# EAGLE board OOBD - BTM182-BTM222 - V5 - EuroPCB (EAGLE 5.11), part 1 of 3
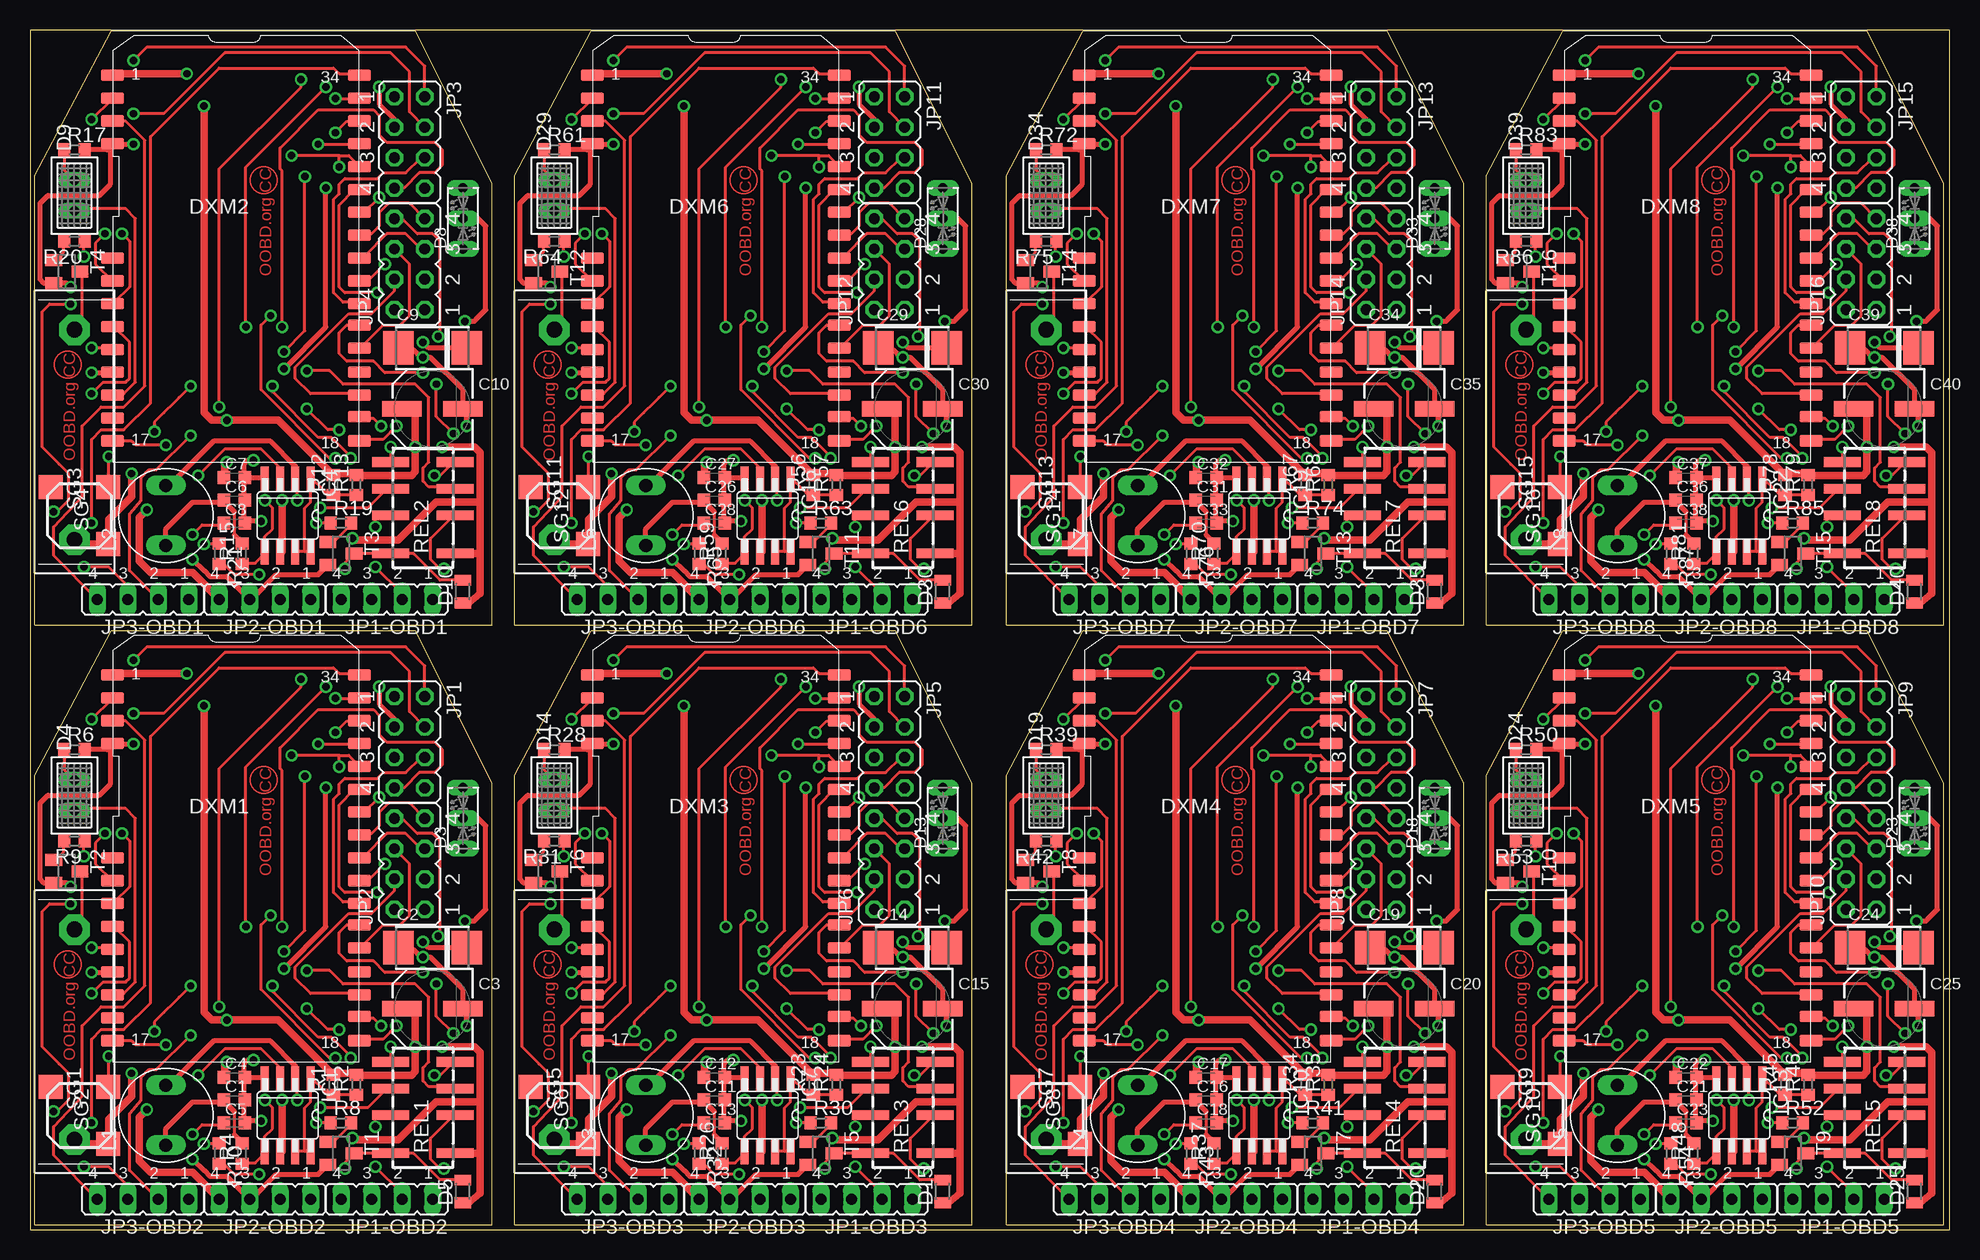
[diagram p0: board, top side]
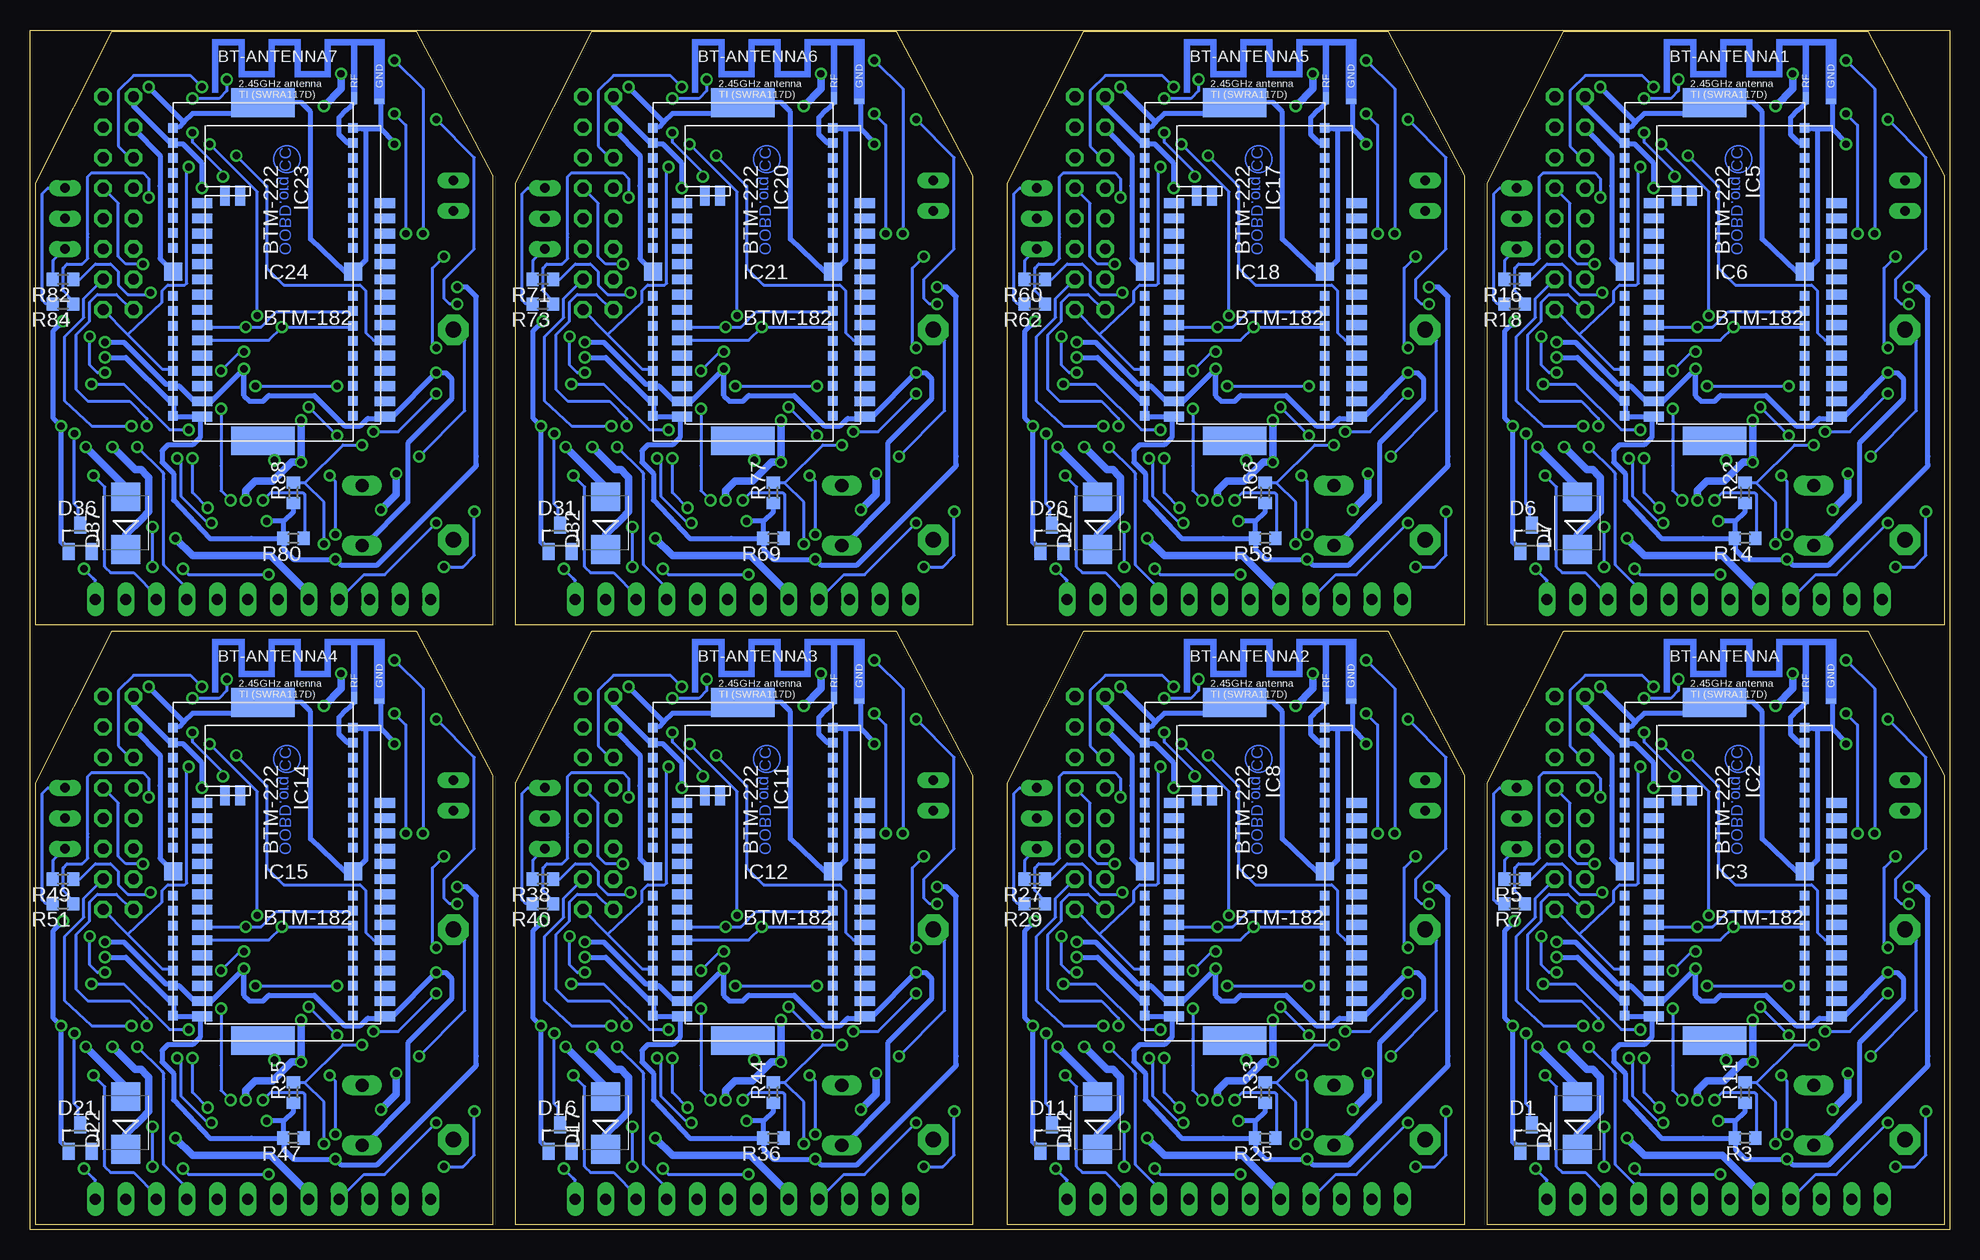
[diagram p1: board, bottom side, seen from below]

Size 160 x 100 mm. Coordinates in mm from the lower left corner, seen from the top.
Outline: 0.41,0.38 38.5,0.38 38.5,37.22 32.15,49.91
Outline: 0.4,0.39 0.4,37.85
Outline: 0.41,37.85 6.75,49.91 32.14,49.91
Outline: 0.41,50.38 38.5,50.38 38.5,87.22 32.15,99.91
Outline: 0.4,50.39 0.4,87.85
Outline: 0.41,87.85 6.75,99.91 32.14,99.91
Outline: 40.41,0.38 78.5,0.38 78.5,37.22 72.15,49.91
Outline: 40.4,0.39 40.4,37.85
Outline: 40.41,37.85 46.75,49.91 72.14,49.91
Outline: 81.41,0.38 119.5,0.38 119.5,37.22 113.15,49.91
Outline: 81.4,0.39 81.4,37.85
Outline: 81.41,37.85 87.75,49.91 113.14,49.91
Outline: 121.41,0.38 159.5,0.38 159.5,37.22 153.15,49.91
Outline: 121.4,0.39 121.4,37.85
Outline: 121.41,37.85 127.75,49.91 153.14,49.91
Outline: 40.41,50.38 78.5,50.38 78.5,87.22 72.15,99.91
Outline: 40.4,50.39 40.4,87.85
Outline: 40.41,87.85 46.75,99.91 72.14,99.91
Outline: 81.41,50.38 119.5,50.38 119.5,87.22 113.15,99.91
Outline: 81.4,50.39 81.4,87.85
Outline: 81.41,87.85 87.75,99.91 113.14,99.91
Outline: 121.41,50.38 159.5,50.38 159.5,87.22 153.15,99.91
Outline: 121.4,50.39 121.4,87.85
Outline: 121.41,87.85 127.75,99.91 153.14,99.91
Outline: 0,100 0,0 112,0 160,0 160,86 160,100 0,100
Copper layers (1*16): Top 0.035mm / dielectric 1.5mm / Bottom 0.035mm
Design rules "default *": minimum track width 10mil, minimum drill 24mil, track to track 8mil, track to pad 8mil, pad to pad 8mil, via to via 8mil, smd to smd 8mil, copper to edge 12mil, drill to drill 8mil, minimum pad ring 10mil, minimum via ring 8mil, stop-mask expansion 4mil, vias tented up to drill 0mil, thermal gap 10mil

## Footprints (pad centres in the part's own frame; a part is rotated, then mirrored left to right if it is on the bottom)
SWRA117D_RIGHT = smd 0.813 x 0.406: GND -0.45,0.25 | smd 0.508 x 1.016: RF -2.55,0.5
C0603K = smd 1.05 x 1.08: 1 -0.875,0; 2 0.875,0
C6032-TE-C = smd 2.54 x 2.794: + 2.857,0; - -2.857,0
SV-D = smd 3.302 x 1.27: + -2.54,0; - 2.54,0
SOT23 = smd 1 x 1.4: 1 -0.95,-1.1; 2 0.95,-1.1; 3 0,1.1
SMB = smd 2.4 x 2.4: A 2.2,0; C -2.2,0
DUOLED2X5 = drill 0.813 long: AG -2.54,0; AR 2.54,0; K 0,0
U57X32 = drill 0.813 long: A -1.27,0; K 1.27,0
MICROMELF-W = smd 0.9 x 1.4: A 0.95,0; C -0.95,0
DMX1-MINI = smd 1.93 x 0.965: 1 0,32.258; 2 0,30.353; 3 0,28.448; 4 0,26.543; 9 0,17.018; 10 0,15.113; 11 0,13.208; 12 0,11.303; 13 0,9.398; 14 0,7.493; 15 0,5.588; 16 0,3.683; 17 0,1.778; 18 20.574,1.778; 19 20.574,3.81; 20 20.574,5.588; 21 20.574,7.493; 22 20.574,9.525; 23 20.574,11.43; 24 20.574,13.208; 25 20.574,15.113; 26 20.574,17.018; 27 20.574,18.923; 28 20.574,20.828; 29 20.574,22.733; 30 20.574,24.638; 31 20.574,26.543; 32 20.574,28.448; 33 20.574,30.353; 34 20.574,32.258
SO8 = smd 0.66 x 2.032: 1 -1.905,-3.073; 2 -0.635,-3.073; 3 0.635,-3.073; 4 1.905,-3.073; 5 1.905,3.073; 6 0.635,3.073; 7 -0.635,3.073; 8 -1.905,3.073
BTM-222 = smd 0.8 x 0.8: P$1 -12.635,-7.5; P$2 -11.385,-7.5; P$3 -10.135,-7.5; P$4 -8.885,-7.5; P$5 -7.635,-7.5; P$6 -6.385,-7.5; P$7 -5.135,-7.5; P$8 -3.885,-7.5; P$9 -2.635,-7.5; P$11 1.365,-7.5; P$12 2.615,-7.5; P$13 3.865,-7.5; P$14 5.115,-7.5; P$15 6.365,-7.5; P$16 7.615,-7.5; P$17 8.865,-7.5; P$18 10.115,-7.5; P$19 11.365,-7.5; P$20 11.365,7.5; P$21 10.115,7.5; P$22 8.865,7.5; P$23 7.615,7.5; P$24 6.365,7.5; P$25 5.115,7.5; P$26 3.865,7.5; P$27 2.615,7.5; P$28 1.365,7.5; P$30 -2.635,7.5; P$31 -3.885,7.5; P$32 -5.135,7.5; P$33 -6.385,7.5; P$34 -7.635,7.5; P$35 -8.885,7.5; P$36 -10.135,7.5; P$37 -11.385,7.5; P$38 -12.635,7.5 | smd 1.5 x 1.5: P$10 -0.635,-7.5; P$29 -0.635,7.5 | smd 2.4 x 5.3: P$AGND -14.735,0; P$BGND 13.465,0
BTM-182 = smd 1.676 x 0.813: P$1 -7.62,7.62; P$2 -7.62,6.35; P$3 -7.62,5.08; P$4 -7.62,3.81; P$5 -7.62,2.54; P$6 -7.62,1.27; P$7 -7.62,0; P$8 -7.62,-1.27; P$9 -7.62,-2.54; P$10 -7.62,-3.81; P$11 -7.62,-5.08; P$12 -7.62,-6.35; P$13 -7.62,-7.62; P$14 -7.62,-8.89; P$15 -7.62,-10.16; P$16 7.62,-10.16; P$17 7.62,-8.89; P$18 7.62,-7.62; P$19 7.62,-6.35; P$20 7.62,-5.08; P$21 7.62,-3.81; P$22 7.62,-2.54; P$23 7.62,-1.27; P$24 7.62,0; P$25 7.62,1.27; P$26 7.62,2.54; P$27 7.62,3.81; P$28 7.62,5.08; P$29 7.62,6.35; P$30 7.62,7.62 | smd 0.813 x 1.676: P$31 -4.445,8.255; P$32 -5.715,8.255
JP4Q = drill 0.914 octagon: 1 -3.81,-1.27; 2 -3.81,1.27; 3 -1.27,-1.27; 4 -1.27,1.27; 5 1.27,-1.27; 6 1.27,1.27; 7 3.81,-1.27; 8 3.81,1.27
JP4 = drill 0.914 long: 1 -3.81,0; 2 -1.27,0; 3 1.27,0; 4 3.81,0
07HCP-XXXX-50 = drill 1.1 long: 1 -2.5,0; 2 2.5,0
R0603 = smd 1 x 1.1: 1 -0.85,0; 2 0.85,0
FTR-B4GA = smd 0.8 x 3.1: 1 -3.8,-3.167; 2 -0.625,-3.167; 3 1.597,-3.167; 4 3.82,-3.167; 5 3.82,2.23; 6 1.597,2.23; 7 -0.625,2.23; 8 -3.8,2.23
PMB24F/V = drill 1.321 pad 2.54 octagon: 1 -9.004,0; 2 8.504,0
BME0603SA = smd 2 x 2: (+)LEAD 4.295,0.425; (-)LEAD -0.475,0.425; NC -0.475,-4.345

## Placement (x,y rotation side)
BT-ANTENNA  [SWRA117D_RIGHT]  9.42,43.81 0 bottom
BT-ANTENNA1  [SWRA117D_RIGHT]  9.42,93.81 0 bottom
BT-ANTENNA2  [SWRA117D_RIGHT]  49.42,43.81 0 bottom
BT-ANTENNA3  [SWRA117D_RIGHT]  90.42,43.81 0 bottom
BT-ANTENNA4  [SWRA117D_RIGHT]  130.42,43.81 0 bottom
BT-ANTENNA5  [SWRA117D_RIGHT]  49.42,93.81 0 bottom
BT-ANTENNA6  [SWRA117D_RIGHT]  90.42,93.81 0 bottom
BT-ANTENNA7  [SWRA117D_RIGHT]  130.42,93.81 0 bottom
C1  1µF  [C0603K]  17.04,10.79 0 top
C2  220µF/6V  [C6032-TE-C]  33.55,23.5 0 top
C3  47µ/35V  [SV-D]  33.55,18.41 0 top
C4  100nF  [C0603K]  17.04,12.7 0 top
C5  470pF  [C0603K]  17.04,8.89 0 top
C6  1µF  [C0603K]  17.04,60.8 0 top
C7  100nF  [C0603K]  17.04,62.7 0 top
C8  470pF  [C0603K]  17.04,58.89 0 top
C9  220µF/6V  [C6032-TE-C]  33.55,73.5 0 top
C10  47µ/35V  [SV-D]  33.55,68.42 0 top
C11  1µF  [C0603K]  57.04,10.79 0 top
C12  100nF  [C0603K]  57.04,12.7 0 top
C13  470pF  [C0603K]  57.04,8.89 0 top
C14  220µF/6V  [C6032-TE-C]  73.55,23.5 0 top
C15  47µ/35V  [SV-D]  73.55,18.41 0 top
C16  1µF  [C0603K]  98.04,10.79 0 top
C17  100nF  [C0603K]  98.04,12.7 0 top
C18  470pF  [C0603K]  98.04,8.89 0 top
C19  220µF/6V  [C6032-TE-C]  114.55,23.5 0 top
C20  47µ/35V  [SV-D]  114.55,18.41 0 top
C21  1µF  [C0603K]  138.04,10.79 0 top
C22  100nF  [C0603K]  138.04,12.7 0 top
C23  470pF  [C0603K]  138.04,8.89 0 top
C24  220µF/6V  [C6032-TE-C]  154.55,23.5 0 top
C25  47µ/35V  [SV-D]  154.55,18.41 0 top
C26  1µF  [C0603K]  57.04,60.8 0 top
C27  100nF  [C0603K]  57.04,62.7 0 top
C28  470pF  [C0603K]  57.04,58.89 0 top
C29  220µF/6V  [C6032-TE-C]  73.55,73.5 0 top
C30  47µ/35V  [SV-D]  73.55,68.42 0 top
C31  1µF  [C0603K]  98.04,60.8 0 top
C32  100nF  [C0603K]  98.04,62.7 0 top
C33  470pF  [C0603K]  98.04,58.89 0 top
C34  220µF/6V  [C6032-TE-C]  114.55,73.5 0 top
C35  47µ/35V  [SV-D]  114.55,68.42 0 top
C36  1µF  [C0603K]  138.04,60.8 0 top
C37  100nF  [C0603K]  138.04,62.7 0 top
C38  470pF  [C0603K]  138.04,58.89 0 top
C39  220µF/6V  [C6032-TE-C]  154.55,73.5 0 top
C40  47µ/35V  [SV-D]  154.55,68.42 0 top
D1  BAS40  [SOT23]  34.82,7.62 0 bottom
D2  B140  [SMB]  31.01,8.89 90 bottom
D3  [DUOLED2X5]  36.09,34.29 90 top
D4  U57X32  [U57X32]  3.71,36.2 90 top
D5  1N4148DO35-7  [MICROMELF-W]  36.09,3.17 90 top
D6  BAS40  [SOT23]  34.82,57.62 0 bottom
D7  B140  [SMB]  31.01,58.89 90 bottom
D8  [DUOLED2X5]  36.09,84.29 90 top
D9  U57X32  [U57X32]  3.71,86.19 90 top
D10  1N4148DO35-7  [MICROMELF-W]  36.09,53.17 90 top
D11  BAS40  [SOT23]  74.82,7.62 0 bottom
D12  B140  [SMB]  71.01,8.89 90 bottom
D13  [DUOLED2X5]  76.09,34.29 90 top
D14  U57X32  [U57X32]  43.7,36.2 90 top
D15  1N4148DO35-7  [MICROMELF-W]  76.09,3.17 90 top
D16  BAS40  [SOT23]  115.82,7.62 0 bottom
D17  B140  [SMB]  112.01,8.89 90 bottom
D18  [DUOLED2X5]  117.09,34.29 90 top
D19  U57X32  [U57X32]  84.7,36.2 90 top
D20  1N4148DO35-7  [MICROMELF-W]  117.09,3.17 90 top
D21  BAS40  [SOT23]  155.82,7.62 0 bottom
D22  B140  [SMB]  152.01,8.89 90 bottom
D23  [DUOLED2X5]  157.09,34.29 90 top
D24  U57X32  [U57X32]  124.7,36.2 90 top
D25  1N4148DO35-7  [MICROMELF-W]  157.09,3.17 90 top
D26  BAS40  [SOT23]  74.82,57.62 0 bottom
D27  B140  [SMB]  71.01,58.89 90 bottom
D28  [DUOLED2X5]  76.09,84.29 90 top
D29  U57X32  [U57X32]  43.7,86.19 90 top
D30  1N4148DO35-7  [MICROMELF-W]  76.09,53.17 90 top
D31  BAS40  [SOT23]  115.82,57.62 0 bottom
D32  B140  [SMB]  112.01,58.89 90 bottom
D33  [DUOLED2X5]  117.09,84.29 90 top
D34  U57X32  [U57X32]  84.7,86.19 90 top
D35  1N4148DO35-7  [MICROMELF-W]  117.09,53.17 90 top
D36  BAS40  [SOT23]  155.82,57.62 0 bottom
D37  B140  [SMB]  152.01,58.89 90 bottom
D38  [DUOLED2X5]  157.09,84.29 90 top
D39  U57X32  [U57X32]  124.7,86.19 90 top
D40  1N4148DO35-7  [MICROMELF-W]  157.09,53.17 90 top
DXM1  [DMX1-MINI]  6.88,13.97 0 top
DXM2  [DMX1-MINI]  6.88,63.97 0 top
DXM3  [DMX1-MINI]  46.88,13.97 0 top
DXM4  [DMX1-MINI]  87.88,13.97 0 top
DXM5  [DMX1-MINI]  127.88,13.97 0 top
DXM6  [DMX1-MINI]  46.88,63.97 0 top
DXM7  [DMX1-MINI]  87.88,63.97 0 top
DXM8  [DMX1-MINI]  127.88,63.97 0 top
IC1  MC34063-SO  [SO8]  21.48,9.53 180 top
IC2  BTM-222  [BTM-222]  19.58,29.21 270 bottom
IC3  BTM-182  [BTM-182]  17.04,27.94 0 bottom
IC4  MC34063-SO  [SO8]  21.48,59.52 180 top
IC5  BTM-222  [BTM-222]  19.58,79.21 270 bottom
IC6  BTM-182  [BTM-182]  17.04,77.94 0 bottom
IC7  MC34063-SO  [SO8]  61.48,9.53 180 top
IC8  BTM-222  [BTM-222]  59.58,29.21 270 bottom
IC9  BTM-182  [BTM-182]  57.04,27.94 0 bottom
IC10  MC34063-SO  [SO8]  102.48,9.53 180 top
IC11  BTM-222  [BTM-222]  100.58,29.21 270 bottom
IC12  BTM-182  [BTM-182]  98.04,27.94 0 bottom
IC13  MC34063-SO  [SO8]  142.49,9.53 180 top
IC14  BTM-222  [BTM-222]  140.58,29.21 270 bottom
IC15  BTM-182  [BTM-182]  138.04,27.94 0 bottom
IC16  MC34063-SO  [SO8]  61.48,59.52 180 top
IC17  BTM-222  [BTM-222]  59.58,79.21 270 bottom
IC18  BTM-182  [BTM-182]  57.04,77.94 0 bottom
IC19  MC34063-SO  [SO8]  102.48,59.52 180 top
IC20  BTM-222  [BTM-222]  100.58,79.21 270 bottom
IC21  BTM-182  [BTM-182]  98.04,77.94 0 bottom
IC22  MC34063-SO  [SO8]  142.49,59.52 180 top
IC23  BTM-222  [BTM-222]  140.58,79.21 270 bottom
IC24  BTM-182  [BTM-182]  138.04,77.94 0 bottom
JP1  Program  [JP4Q]  31.64,40.64 270 top
JP1-OBD1  [JP4]  29.74,52.54 180 top
JP1-OBD2  [JP4]  29.74,2.54 180 top
JP1-OBD3  [JP4]  69.74,2.54 180 top
JP1-OBD4  [JP4]  110.74,2.54 180 top
JP1-OBD5  [JP4]  150.74,2.54 180 top
JP1-OBD6  [JP4]  69.74,52.54 180 top
JP1-OBD7  [JP4]  110.74,52.54 180 top
JP1-OBD8  [JP4]  150.74,52.54 180 top
JP2  SPI / SD-Card  [JP4Q]  31.64,30.48 90 top
JP2-OBD1  [JP4]  19.58,52.54 180 top
JP2-OBD2  [JP4]  19.58,2.54 180 top
JP2-OBD3  [JP4]  59.58,2.54 180 top
JP2-OBD4  [JP4]  100.58,2.54 180 top
JP2-OBD5  [JP4]  140.58,2.54 180 top
JP2-OBD6  [JP4]  59.58,52.54 180 top
JP2-OBD7  [JP4]  100.58,52.54 180 top
JP2-OBD8  [JP4]  140.58,52.54 180 top
JP3  Program  [JP4Q]  31.64,90.64 270 top
JP3-OBD1  [JP4]  9.42,52.54 180 top
JP3-OBD2  [JP4]  9.42,2.54 180 top
JP3-OBD3  [JP4]  49.42,2.54 180 top
JP3-OBD4  [JP4]  90.42,2.54 180 top
JP3-OBD5  [JP4]  130.42,2.54 180 top
JP3-OBD6  [JP4]  49.42,52.54 180 top
JP3-OBD7  [JP4]  90.42,52.54 180 top
JP3-OBD8  [JP4]  130.42,52.54 180 top
JP4  SPI / SD-Card  [JP4Q]  31.64,80.48 90 top
JP5  Program  [JP4Q]  71.64,40.64 270 top
JP6  SPI / SD-Card  [JP4Q]  71.64,30.48 90 top
JP7  Program  [JP4Q]  112.64,40.64 270 top
JP8  SPI / SD-Card  [JP4Q]  112.64,30.48 90 top
JP9  Program  [JP4Q]  152.65,40.64 270 top
JP10  SPI / SD-Card  [JP4Q]  152.65,30.48 90 top
JP11  Program  [JP4Q]  71.64,90.64 270 top
JP12  SPI / SD-Card  [JP4Q]  71.64,80.48 90 top
JP13  Program  [JP4Q]  112.64,90.64 270 top
JP14  SPI / SD-Card  [JP4Q]  112.64,80.48 90 top
JP15  Program  [JP4Q]  152.65,90.64 270 top
JP16  SPI / SD-Card  [JP4Q]  152.65,80.48 90 top
L1  220µH  [07HCP-XXXX-50]  11.32,9.53 90 top
L2  220µH  [07HCP-XXXX-50]  11.32,59.52 90 top
L3  220µH  [07HCP-XXXX-50]  51.33,9.53 90 top
L4  220µH  [07HCP-XXXX-50]  92.33,9.53 90 top
L5  220µH  [07HCP-XXXX-50]  132.32,9.53 90 top
L6  220µH  [07HCP-XXXX-50]  51.33,59.52 90 top
L7  220µH  [07HCP-XXXX-50]  92.33,59.52 90 top
L8  220µH  [07HCP-XXXX-50]  132.32,59.52 90 top
R1  1R  [R0603]  25.3,12.06 90 top
R2  1R  [R0603]  27.2,12.06 90 top
R3  1K  [R0603]  17.04,7.62 180 bottom
R4  1K6  [R0603]  17.68,6.35 90 top
R5  100R  [R0603]  36.25,29.21 180 bottom
R6  120R  [R0603]  3.71,40.01 0 top
R7  100R  [R0603]  36.25,27.15 180 bottom
R8  4K7  [R0603]  25.93,8.89 0 top
R9  4K7  [R0603]  3.71,32.38 180 top
R10  180k  [R0603]  15.77,6.35 270 top
R11  47k  [R0603]  17.04,11.43 90 bottom
R12  1R  [R0603]  25.3,62.06 90 top
R13  1R  [R0603]  27.2,62.06 90 top
R14  1K  [R0603]  17.04,57.62 180 bottom
R15  1K6  [R0603]  17.68,56.35 90 top
R16  100R  [R0603]  36.25,79.21 180 bottom
R17  120R  [R0603]  3.71,90 0 top
R18  100R  [R0603]  36.25,77.15 180 bottom
R19  4K7  [R0603]  25.93,58.89 0 top
R20  4K7  [R0603]  3.71,82.39 180 top
R21  180k  [R0603]  15.77,56.35 270 top
R22  47k  [R0603]  17.04,61.43 90 bottom
R23  1R  [R0603]  65.3,12.06 90 top
R24  1R  [R0603]  67.2,12.06 90 top
R25  1K  [R0603]  57.04,7.62 180 bottom
R26  1K6  [R0603]  57.67,6.35 90 top
R27  100R  [R0603]  76.25,29.21 180 bottom
R28  120R  [R0603]  43.7,40.01 0 top
R29  100R  [R0603]  76.25,27.15 180 bottom
R30  4K7  [R0603]  65.93,8.89 0 top
R31  4K7  [R0603]  43.7,32.38 180 top
R32  180k  [R0603]  55.77,6.35 270 top
R33  47k  [R0603]  57.04,11.43 90 bottom
R34  1R  [R0603]  106.3,12.06 90 top
R35  1R  [R0603]  108.2,12.06 90 top
R36  1K  [R0603]  98.04,7.62 180 bottom
R37  1K6  [R0603]  98.67,6.35 90 top
R38  100R  [R0603]  117.25,29.21 180 bottom
R39  120R  [R0603]  84.7,40.01 0 top
R40  100R  [R0603]  117.25,27.15 180 bottom
R41  4K7  [R0603]  106.93,8.89 0 top
R42  4K7  [R0603]  84.7,32.38 180 top
R43  180k  [R0603]  96.77,6.35 270 top
R44  47k  [R0603]  98.04,11.43 90 bottom
R45  1R  [R0603]  146.29,12.06 90 top
R46  1R  [R0603]  148.2,12.06 90 top
R47  1K  [R0603]  138.04,7.62 180 bottom
R48  1K6  [R0603]  138.68,6.35 90 top
R49  100R  [R0603]  157.25,29.21 180 bottom
R50  120R  [R0603]  124.7,40.01 0 top
R51  100R  [R0603]  157.25,27.15 180 bottom
R52  4K7  [R0603]  146.93,8.89 0 top
R53  4K7  [R0603]  124.7,32.38 180 top
R54  180k  [R0603]  136.77,6.35 270 top
R55  47k  [R0603]  138.04,11.43 90 bottom
R56  1R  [R0603]  65.3,62.06 90 top
R57  1R  [R0603]  67.2,62.06 90 top
R58  1K  [R0603]  57.04,57.62 180 bottom
R59  1K6  [R0603]  57.67,56.35 90 top
R60  100R  [R0603]  76.25,79.21 180 bottom
R61  120R  [R0603]  43.7,90 0 top
R62  100R  [R0603]  76.25,77.15 180 bottom
R63  4K7  [R0603]  65.93,58.89 0 top
R64  4K7  [R0603]  43.7,82.39 180 top
R65  180k  [R0603]  55.77,56.35 270 top
R66  47k  [R0603]  57.04,61.43 90 bottom
R67  1R  [R0603]  106.3,62.06 90 top
R68  1R  [R0603]  108.2,62.06 90 top
R69  1K  [R0603]  98.04,57.62 180 bottom
R70  1K6  [R0603]  98.67,56.35 90 top
R71  100R  [R0603]  117.25,79.21 180 bottom
R72  120R  [R0603]  84.7,90 0 top
R73  100R  [R0603]  117.25,77.15 180 bottom
R74  4K7  [R0603]  106.93,58.89 0 top
R75  4K7  [R0603]  84.7,82.39 180 top
R76  180k  [R0603]  96.77,56.35 270 top
R77  47k  [R0603]  98.04,61.43 90 bottom
R78  1R  [R0603]  146.29,62.06 90 top
R79  1R  [R0603]  148.2,62.06 90 top
R80  1K  [R0603]  138.04,57.62 180 bottom
R81  1K6  [R0603]  138.68,56.35 90 top
R82  100R  [R0603]  157.25,79.21 180 bottom
R83  120R  [R0603]  124.7,90 0 top
R84  100R  [R0603]  157.25,77.15 180 bottom
R85  4K7  [R0603]  146.93,58.89 0 top
R86  4K7  [R0603]  124.7,82.39 180 top
R87  180k  [R0603]  136.77,56.35 270 top
R88  47k  [R0603]  138.04,61.43 90 bottom
REL1  FTR-B4GA  [FTR-B4GA]  32.28,10.16 90 top
REL2  FTR-B4GA  [FTR-B4GA]  32.28,60.16 90 top
REL3  FTR-B4GA  [FTR-B4GA]  72.28,10.16 90 top
REL4  FTR-B4GA  [FTR-B4GA]  113.28,10.16 90 top
REL5  FTR-B4GA  [FTR-B4GA]  153.28,10.16 90 top
REL6  FTR-B4GA  [FTR-B4GA]  72.28,60.16 90 top
REL7  FTR-B4GA  [FTR-B4GA]  113.28,60.16 90 top
REL8  FTR-B4GA  [FTR-B4GA]  153.28,60.16 90 top
SG1  PMB24FV  [PMB24F/V]  3.71,16.51 90 top
SG2  MBWOE  [BME0603SA]  6.09,11.43 270 top
SG3  PMB24FV  [PMB24F/V]  3.71,66.51 90 top
SG4  MBWOE  [BME0603SA]  6.09,61.43 270 top
SG5  PMB24FV  [PMB24F/V]  43.7,16.51 90 top
SG6  MBWOE  [BME0603SA]  46.09,11.43 270 top
SG7  PMB24FV  [PMB24F/V]  84.7,16.51 90 top
SG8  MBWOE  [BME0603SA]  87.09,11.43 270 top
SG9  PMB24FV  [PMB24F/V]  124.7,16.51 90 top
SG10  MBWOE  [BME0603SA]  127.09,11.43 270 top
SG11  PMB24FV  [PMB24F/V]  43.7,66.51 90 top
SG12  MBWOE  [BME0603SA]  46.09,61.43 270 top
SG13  PMB24FV  [PMB24F/V]  84.7,66.51 90 top
SG14  MBWOE  [BME0603SA]  87.09,61.43 270 top
SG15  PMB24FV  [PMB24F/V]  124.7,66.51 90 top
SG16  MBWOE  [BME0603SA]  127.09,61.43 270 top
T1  BC847  [SOT23]  25.93,6.35 270 top
T2  BC847  [SOT23]  3.07,29.84 270 top
T3  BC847  [SOT23]  25.93,56.35 270 top
T4  BC847  [SOT23]  3.07,79.84 270 top
T5  BC847  [SOT23]  65.93,6.35 270 top
T6  BC847  [SOT23]  43.07,29.84 270 top
T7  BC847  [SOT23]  106.93,6.35 270 top
T8  BC847  [SOT23]  84.07,29.84 270 top
T9  BC847  [SOT23]  146.93,6.35 270 top
T10  BC847  [SOT23]  124.07,29.84 270 top
T11  BC847  [SOT23]  65.93,56.35 270 top
T12  BC847  [SOT23]  43.07,79.84 270 top
T13  BC847  [SOT23]  106.93,56.35 270 top
T14  BC847  [SOT23]  84.07,79.84 270 top
T15  BC847  [SOT23]  146.93,56.35 270 top
T16  BC847  [SOT23]  124.07,79.84 270 top

## Library data of the parts
BT-ANTENNA BT-ANTENNA1-BT-ANTENNA7 = ant-planar-1
C1 C4-C8 C11-C13 C16-C18 C21-C23 C26-C28 C31-C33 C36-C38 R1-R88 = rcl
C2 C9 C14 C19 C24 C29 C34 C39 = rc-master
C3 C10 C15 C20 C25 C30 C35 C40 = cap-master
D1 D2 D5-D7 D10-D12 D15-D17 D20-D22 D25-D27 D30-D32 D35-D37 D40 = diode
D3 D4 D8 D9 D13 D14 D18 D19 D23 D24 D28 D29 D33 D34 D38 D39 = led
DXM1-DXM8 = DXM
IC1 IC4 IC7 IC10 IC13 IC16 IC19 IC22 = mc34063
IC2 IC5 IC8 IC11 IC14 IC17 IC20 IC23 = btm-222
IC3 IC6 IC9 IC12 IC15 IC18 IC21 IC24 = BTM182
JP1 JP1-OBD1-JP1-OBD8 JP2 JP2-OBD1-JP2-OBD8 JP3 JP3-OBD1-JP3-OBD8 JP4-JP16 = jumper
L1-L8 = Inductor-Fastron
REL1-REL8 = relay; MN: Fujitsu; MPN: FTR-B4GAxxxZ; OC_REICHELT: FTR-B4GA 12V
SG1 SG3 SG5 SG7 SG9 SG11 SG13 SG15 = buzzer; OC_CONRAD: Best.-Nr.: 752223 - 62 [Teilenummer: 185110]
SG2 SG4 SG6 SG8 SG10 SG12 SG14 SG16 = buzzer; MF: Grewus
T1-T16 = transistor

## Nets
3V3OUT: DXM1.9
3V3OUT1: DXM2.9
3V3OUT2: DXM3.9
3V3OUT3: DXM4.9
3V3OUT4: DXM5.9
3V3OUT5: DXM6.9
3V3OUT6: DXM7.9
3V3OUT7: DXM8.9
12V_DOUT: C3.+ C4.1 D2.C DXM1.1 IC1.6 R1.2 R2.2
12V_DOUT1: C7.1 C10.+ D7.C DXM2.1 IC4.6 R12.2 R13.2
12V_DOUT2: C12.1 C15.+ D12.C DXM3.1 IC7.6 R23.2 R24.2
12V_DOUT3: C17.1 C20.+ D17.C DXM4.1 IC10.6 R34.2 R35.2
12V_DOUT4: C22.1 C25.+ D22.C DXM5.1 IC13.6 R45.2 R46.2
12V_DOUT5: C27.1 C30.+ D27.C DXM6.1 IC16.6 R56.2 R57.2
12V_DOUT6: C32.1 C35.+ D32.C DXM7.1 IC19.6 R67.2 R68.2
12V_DOUT7: C37.1 C40.+ D37.C DXM8.1 IC22.6 R78.2 R79.2
+3V1: C6.1 C9.+ DXM2.14 IC5.P$2 IC5.P$17 IC6.P$14 IC6.P$16 JP3.1 L2.1 R15.2
+3V2: C11.1 C14.+ DXM3.14 IC8.P$2 IC8.P$17 IC9.P$14 IC9.P$16 JP5.1 L3.1 R26.2
+3V3: C1.1 C2.+ DXM1.14 IC2.P$2 IC2.P$17 IC3.P$14 IC3.P$16 JP1.1 L1.1 R4.2
+3V4: C16.1 C19.+ DXM4.14 IC11.P$2 IC11.P$17 IC12.P$14 IC12.P$16 JP7.1 L4.1 R37.2
+3V5: C21.1 C24.+ DXM5.14 IC14.P$2 IC14.P$17 IC15.P$14 IC15.P$16 JP9.1 L5.1 R48.2
+3V6: C26.1 C29.+ DXM6.14 IC17.P$2 IC17.P$17 IC18.P$14 IC18.P$16 JP11.1 L6.1 R59.2
+3V7: C31.1 C34.+ DXM7.14 IC20.P$2 IC20.P$17 IC21.P$14 IC21.P$16 JP13.1 L7.1 R70.2
+3V8: C36.1 C39.+ DXM8.14 IC23.P$2 IC23.P$17 IC24.P$14 IC24.P$16 JP15.1 L8.1 R81.2
+12V: D2.A D5.C JP2-OBD2.4 REL1.1 SG1.1 SG2.(+)LEAD
+12V1: D7.A D10.C JP2-OBD1.4 REL2.1 SG3.1 SG4.(+)LEAD
+12V2: D12.A D15.C JP2-OBD3.4 REL3.1 SG5.1 SG6.(+)LEAD
+12V3: D17.A D20.C JP2-OBD4.4 REL4.1 SG7.1 SG8.(+)LEAD
+12V4: D22.A D25.C JP2-OBD5.4 REL5.1 SG9.1 SG10.(+)LEAD
+12V5: D27.A D30.C JP2-OBD6.4 REL6.1 SG11.1 SG12.(+)LEAD
+12V6: D32.A D35.C JP2-OBD7.4 REL7.1 SG13.1 SG14.(+)LEAD
+12V7: D37.A D40.C JP2-OBD8.4 REL8.1 SG15.1 SG16.(+)LEAD
A0: DXM1.18 JP2.3
A1: DXM2.18 JP4.3
A2: DXM3.18 JP6.3
A3: DXM4.18 JP8.3
A4: DXM5.18 JP10.3
A5: DXM6.18 JP12.3
A6: DXM7.18 JP14.3
A7: DXM8.18 JP16.3
CS: DXM1.19 JP2.2
CS1: DXM2.19 JP4.2
CS2: DXM3.19 JP6.2
CS3: DXM4.19 JP8.2
CS4: DXM5.19 JP10.2
CS5: DXM6.19 JP12.2
CS6: DXM7.19 JP14.2
CS7: DXM8.19 JP16.2
CTS: DXM1.26 JP2.5
CTS1: DXM2.26 JP4.5
CTS2: DXM3.26 JP6.5
CTS3: DXM4.26 JP8.5
CTS4: DXM5.26 JP10.5
CTS5: DXM6.26 JP12.5
CTS6: DXM7.26 JP14.5
CTS7: DXM8.26 JP16.5
GND: BT-ANTENNA.GND C1.2 C2.- C3.- C4.2 C5.2 D1.1 D3.K DXM1.4 IC1.4 IC2.P$1 IC2.P$10 IC2.P$18 IC2.P$19 IC2.P$29 IC2.P$38 IC2.P$AGND IC2.P$BGND IC3.P$15 JP1.3 JP2-OBD2.3 R3.2 R6.2 R11.1 T1.2 T2.2
GND1: BT-ANTENNA1.GND C6.2 C7.2 C8.2 C9.- C10.- D6.1 D8.K DXM2.4 IC4.4 IC5.P$1 IC5.P$10 IC5.P$18 IC5.P$19 IC5.P$29 IC5.P$38 IC5.P$AGND IC5.P$BGND IC6.P$15 JP2-OBD1.3 JP3.3 R14.2 R17.2 R22.1 T3.2 T4.2
GND2: BT-ANTENNA2.GND C11.2 C12.2 C13.2 C14.- C15.- D11.1 D13.K DXM3.4 IC7.4 IC8.P$1 IC8.P$10 IC8.P$18 IC8.P$19 IC8.P$29 IC8.P$38 IC8.P$AGND IC8.P$BGND IC9.P$15 JP2-OBD3.3 JP5.3 R25.2 R28.2 R33.1 T5.2 T6.2
GND3: BT-ANTENNA3.GND C16.2 C17.2 C18.2 C19.- C20.- D16.1 D18.K DXM4.4 IC10.4 IC11.P$1 IC11.P$10 IC11.P$18 IC11.P$19 IC11.P$29 IC11.P$38 IC11.P$AGND IC11.P$BGND IC12.P$15 JP2-OBD4.3 JP7.3 R36.2 R39.2 R44.1 T7.2 T8.2
GND4: BT-ANTENNA4.GND C21.2 C22.2 C23.2 C24.- C25.- D21.1 D23.K DXM5.4 IC13.4 IC14.P$1 IC14.P$10 IC14.P$18 IC14.P$19 IC14.P$29 IC14.P$38 IC14.P$AGND IC14.P$BGND IC15.P$15 JP2-OBD5.3 JP9.3 R47.2 R50.2 R55.1 T9.2 T10.2
GND5: BT-ANTENNA5.GND C26.2 C27.2 C28.2 C29.- C30.- D26.1 D28.K DXM6.4 IC16.4 IC17.P$1 IC17.P$10 IC17.P$18 IC17.P$19 IC17.P$29 IC17.P$38 IC17.P$AGND IC17.P$BGND IC18.P$15 JP2-OBD6.3 JP11.3 R58.2 R61.2 R66.1 T11.2 T12.2
GND6: BT-ANTENNA6.GND C31.2 C32.2 C33.2 C34.- C35.- D31.1 D33.K DXM7.4 IC19.4 IC20.P$1 IC20.P$10 IC20.P$18 IC20.P$19 IC20.P$29 IC20.P$38 IC20.P$AGND IC20.P$BGND IC21.P$15 JP2-OBD7.3 JP13.3 R69.2 R72.2 R77.1 T13.2 T14.2
GND7: BT-ANTENNA7.GND C36.2 C37.2 C38.2 C39.- C40.- D36.1 D38.K DXM8.4 IC22.4 IC23.P$1 IC23.P$10 IC23.P$18 IC23.P$19 IC23.P$29 IC23.P$38 IC23.P$AGND IC23.P$BGND IC24.P$15 JP2-OBD8.3 JP15.3 R80.2 R83.2 R88.1 T15.2 T16.2
HS_CAN-H: JP1-OBD2.3 REL1.4
HS_CAN-H1: JP1-OBD1.3 REL2.4
HS_CAN-H2: JP1-OBD3.3 REL3.4
HS_CAN-H3: JP1-OBD4.3 REL4.4
HS_CAN-H4: JP1-OBD5.3 REL5.4
HS_CAN-H5: JP1-OBD6.3 REL6.4
HS_CAN-H6: JP1-OBD7.3 REL7.4
HS_CAN-H7: JP1-OBD8.3 REL8.4
HS_CAN-L: JP1-OBD2.4 REL1.5
HS_CAN-L1: JP1-OBD1.4 REL2.5
HS_CAN-L2: JP1-OBD3.4 REL3.5
HS_CAN-L3: JP1-OBD4.4 REL4.5
HS_CAN-L4: JP1-OBD5.4 REL5.5
HS_CAN-L5: JP1-OBD6.4 REL6.5
HS_CAN-L6: JP1-OBD7.4 REL7.5
HS_CAN-L7: JP1-OBD8.4 REL8.5
K-LINE: DXM1.33 JP3-OBD2.2
K-LINE1: DXM2.33 JP3-OBD1.2
K-LINE2: DXM3.33 JP3-OBD3.2
K-LINE3: DXM4.33 JP3-OBD4.2
K-LINE4: DXM5.33 JP3-OBD5.2
K-LINE5: DXM6.33 JP3-OBD6.2
K-LINE6: DXM7.33 JP3-OBD7.2
K-LINE7: DXM8.33 JP3-OBD8.2
L-LINE: DXM1.34 JP3-OBD2.1
L-LINE1: DXM2.34 JP3-OBD1.1
L-LINE2: DXM3.34 JP3-OBD3.1
L-LINE3: DXM4.34 JP3-OBD4.1
L-LINE4: DXM5.34 JP3-OBD5.1
L-LINE5: DXM6.34 JP3-OBD6.1
L-LINE6: DXM7.34 JP3-OBD7.1
L-LINE7: DXM8.34 JP3-OBD8.1
MISO: DXM1.22 JP2.6
MISO1: DXM2.22 JP4.6
MISO2: DXM3.22 JP6.6
MISO3: DXM4.22 JP8.6
MISO4: DXM5.22 JP10.6
MISO5: DXM6.22 JP12.6
MISO6: DXM7.22 JP14.6
MISO7: DXM8.22 JP16.6
MOSI: DXM1.23 JP2.8
MOSI1: DXM2.23 JP4.8
MOSI2: DXM3.23 JP6.8
MOSI3: DXM4.23 JP8.8
MOSI4: DXM5.23 JP10.8
MOSI5: DXM6.23 JP12.8
MOSI6: DXM7.23 JP14.8
MOSI7: DXM8.23 JP16.8
MS_CAN-H: JP1-OBD2.1 REL1.2
MS_CAN-H1: JP1-OBD1.1 REL2.2
MS_CAN-H2: JP1-OBD3.1 REL3.2
MS_CAN-H3: JP1-OBD4.1 REL4.2
MS_CAN-H4: JP1-OBD5.1 REL5.2
MS_CAN-H5: JP1-OBD6.1 REL6.2
MS_CAN-H6: JP1-OBD7.1 REL7.2
MS_CAN-H7: JP1-OBD8.1 REL8.2
MS_CAN-L: JP1-OBD2.2 REL1.7
MS_CAN-L1: JP1-OBD1.2 REL2.7
MS_CAN-L2: JP1-OBD3.2 REL3.7
MS_CAN-L3: JP1-OBD4.2 REL4.7
MS_CAN-L4: JP1-OBD5.2 REL5.7
MS_CAN-L5: JP1-OBD6.2 REL6.7
MS_CAN-L6: JP1-OBD7.2 REL7.7
MS_CAN-L7: JP1-OBD8.2 REL8.7
N$1: IC1.5 R3.1 R4.1
N$2: C5.1 IC1.3
N$3: IC2.P$27 IC3.P$9 JP1.7
N$4: D3.AR R7.2
N$5: IC1.1 IC1.7 IC1.8 R1.1 R2.1
N$6: D3.AG R5.2
N$7: D4.K R6.1
N$8: D4.A DXM1.15
N$9: DXM1.29 R5.1
N$10: DXM1.25 JP1.8
N$11: C8.1 IC4.3
N$12: DXM1.24 JP1.6
N$13: IC2.P$26 IC3.P$10 JP1.5
N$14: IC4.1 IC4.7 IC4.8 R12.1 R13.1
N$15: DXM1.28 R7.1
N$16: DXM1.10 JP1.2
N$17: DXM1.11 JP1.4
N$18: IC4.5 R14.1 R15.1
N$19: DXM1.17 R10.1 R11.2
N$20: R8.2 T1.1
N$21: DXM1.32 REL1.3
N$22: DXM1.31 REL1.6
N$23: SG1.2 SG2.(-)LEAD T2.3
N$24: R9.2 T2.1
N$25: DXM1.12 R8.1
N$26: DXM1.13 R9.1
N$27: D5.A R10.2 REL1.8 T1.3
N$28: DXM2.24 JP3.6
N$29: D1.3 IC1.2 L1.2
N$30: DXM2.10 JP3.2
N$31: DXM2.11 JP3.4
N$32: DXM2.25 JP3.8
N$33: D8.AR R18.2
N$34: D8.AG R16.2
N$35: D9.K R17.1
N$36: D9.A DXM2.15
N$37: DXM2.28 R18.1
N$38: DXM2.29 R16.1
N$39: DXM2.17 R21.1 R22.2
N$40: R19.2 T3.1
N$41: DXM2.32 REL2.3
N$42: DXM2.31 REL2.6
N$43: SG3.2 SG4.(-)LEAD T4.3
N$44: R20.2 T4.1
N$45: DXM2.12 R19.1
N$46: DXM2.13 R20.1
N$47: D10.A R21.2 REL2.8 T3.3
N$48: D6.3 IC4.2 L2.2
N$49: IC5.P$26 IC6.P$10 JP3.5
N$50: IC5.P$27 IC6.P$9 JP3.7
N$51: C13.1 IC7.3
N$52: IC7.1 IC7.7 IC7.8 R23.1 R24.1
N$53: IC7.5 R25.1 R26.1
N$54: DXM3.24 JP5.6
N$55: DXM3.10 JP5.2
N$56: DXM3.11 JP5.4
N$57: DXM3.25 JP5.8
N$58: D13.AR R29.2
N$59: D13.AG R27.2
N$60: D14.K R28.1
N$61: D14.A DXM3.15
N$62: DXM3.28 R29.1
N$63: DXM3.29 R27.1
N$64: DXM3.17 R32.1 R33.2
N$65: R30.2 T5.1
N$66: DXM3.32 REL3.3
N$67: DXM3.31 REL3.6
N$68: SG5.2 SG6.(-)LEAD T6.3
N$69: R31.2 T6.1
N$70: DXM3.12 R30.1
N$71: DXM3.13 R31.1
N$72: D15.A R32.2 REL3.8 T5.3
N$73: D11.3 IC7.2 L3.2
N$74: IC8.P$26 IC9.P$10 JP5.5
N$75: IC8.P$27 IC9.P$9 JP5.7
N$76: C18.1 IC10.3
N$77: IC10.1 IC10.7 IC10.8 R34.1 R35.1
N$78: IC10.5 R36.1 R37.1
N$79: DXM4.24 JP7.6
N$80: DXM4.10 JP7.2
N$81: DXM4.11 JP7.4
N$82: DXM4.25 JP7.8
N$83: D18.AR R40.2
N$84: D18.AG R38.2
N$85: D19.K R39.1
N$86: D19.A DXM4.15
N$87: DXM4.28 R40.1
N$88: DXM4.29 R38.1
N$89: DXM4.17 R43.1 R44.2
N$90: R41.2 T7.1
N$91: DXM4.32 REL4.3
N$92: DXM4.31 REL4.6
N$93: SG7.2 SG8.(-)LEAD T8.3
N$94: R42.2 T8.1
N$95: DXM4.12 R41.1
N$96: DXM4.13 R42.1
N$97: D20.A R43.2 REL4.8 T7.3
N$98: D16.3 IC10.2 L4.2
N$99: IC11.P$26 IC12.P$10 JP7.5
N$100: IC11.P$27 IC12.P$9 JP7.7
N$101: C23.1 IC13.3
N$102: IC13.1 IC13.7 IC13.8 R45.1 R46.1
N$103: IC13.5 R47.1 R48.1
N$104: DXM5.24 JP9.6
N$105: DXM5.10 JP9.2
N$106: DXM5.11 JP9.4
N$107: DXM5.25 JP9.8
N$108: D23.AR R51.2
N$109: D23.AG R49.2
N$110: D24.K R50.1
N$111: D24.A DXM5.15
N$112: DXM5.28 R51.1
N$113: DXM5.29 R49.1
N$114: DXM5.17 R54.1 R55.2
N$115: R52.2 T9.1
N$116: DXM5.32 REL5.3
N$117: DXM5.31 REL5.6
N$118: SG9.2 SG10.(-)LEAD T10.3
N$119: R53.2 T10.1
N$120: DXM5.12 R52.1
N$121: DXM5.13 R53.1
N$122: D25.A R54.2 REL5.8 T9.3
N$123: D21.3 IC13.2 L5.2
N$124: IC14.P$26 IC15.P$10 JP9.5
N$125: IC14.P$27 IC15.P$9 JP9.7
N$126: C28.1 IC16.3
N$127: IC16.1 IC16.7 IC16.8 R56.1 R57.1
N$128: IC16.5 R58.1 R59.1
N$129: DXM6.24 JP11.6
N$130: DXM6.10 JP11.2
N$131: DXM6.11 JP11.4
N$132: DXM6.25 JP11.8
N$133: D28.AR R62.2
N$134: D28.AG R60.2
N$135: D29.K R61.1
N$136: D29.A DXM6.15
N$137: DXM6.28 R62.1
N$138: DXM6.29 R60.1
N$139: DXM6.17 R65.1 R66.2
N$140: R63.2 T11.1
N$141: DXM6.32 REL6.3
N$142: DXM6.31 REL6.6
N$143: SG11.2 SG12.(-)LEAD T12.3
N$144: R64.2 T12.1
N$145: DXM6.12 R63.1
N$146: DXM6.13 R64.1
N$147: D30.A R65.2 REL6.8 T11.3
N$148: D26.3 IC16.2 L6.2
N$149: IC17.P$26 IC18.P$10 JP11.5
N$150: IC17.P$27 IC18.P$9 JP11.7
N$151: C33.1 IC19.3
N$152: IC19.1 IC19.7 IC19.8 R67.1 R68.1
N$153: IC19.5 R69.1 R70.1
N$154: DXM7.24 JP13.6
N$155: DXM7.10 JP13.2
N$156: DXM7.11 JP13.4
N$157: DXM7.25 JP13.8
N$158: D33.AR R73.2
N$159: D33.AG R71.2
N$160: D34.K R72.1
N$161: D34.A DXM7.15
N$162: DXM7.28 R73.1
N$163: DXM7.29 R71.1
N$164: DXM7.17 R76.1 R77.2
N$165: R74.2 T13.1
N$166: DXM7.32 REL7.3
N$167: DXM7.31 REL7.6
N$168: SG13.2 SG14.(-)LEAD T14.3
N$169: R75.2 T14.1
N$170: DXM7.12 R74.1
N$171: DXM7.13 R75.1
N$172: D35.A R76.2 REL7.8 T13.3
N$173: D31.3 IC19.2 L7.2
N$174: IC20.P$26 IC21.P$10 JP13.5
N$175: IC20.P$27 IC21.P$9 JP13.7
N$176: C38.1 IC22.3
N$177: IC22.1 IC22.7 IC22.8 R78.1 R79.1
N$178: IC22.5 R80.1 R81.1
N$179: DXM8.24 JP15.6
N$180: DXM8.10 JP15.2
N$181: DXM8.11 JP15.4
N$182: DXM8.25 JP15.8
N$183: D38.AR R84.2
N$184: D38.AG R82.2
N$185: D39.K R83.1
N$186: D39.A DXM8.15
N$187: DXM8.28 R84.1
N$188: DXM8.29 R82.1
N$189: DXM8.17 R87.1 R88.2
N$190: R85.2 T15.1
N$191: DXM8.32 REL8.3
N$192: DXM8.31 REL8.6
N$193: SG15.2 SG16.(-)LEAD T16.3
N$194: R86.2 T16.1
N$195: DXM8.12 R85.1
N$196: DXM8.13 R86.1
N$197: D40.A R87.2 REL8.8 T15.3
N$198: D36.3 IC22.2 L8.2
N$199: IC23.P$26 IC24.P$10 JP15.5
N$200: IC23.P$27 IC24.P$9 JP15.7
NOT_RESET: DXM1.30 IC2.P$16 IC3.P$21 JP2.1
NOT_RESET1: DXM2.30 IC5.P$16 IC6.P$21 JP4.1
NOT_RESET2: DXM3.30 IC8.P$16 IC9.P$21 JP6.1
NOT_RESET3: DXM4.30 IC11.P$16 IC12.P$21 JP8.1
NOT_RESET4: DXM5.30 IC14.P$16 IC15.P$21 JP10.1
NOT_RESET5: DXM6.30 IC17.P$16 IC18.P$21 JP12.1
NOT_RESET6: DXM7.30 IC20.P$16 IC21.P$21 JP14.1
NOT_RESET7: DXM8.30 IC23.P$16 IC24.P$21 JP16.1
PWM+: DXM1.2 JP3-OBD2.3
PWM+1: DXM2.2 JP3-OBD1.3
PWM+2: DXM3.2 JP3-OBD3.3
PWM+3: DXM4.2 JP3-OBD4.3
PWM+4: DXM5.2 JP3-OBD5.3
PWM+5: DXM6.2 JP3-OBD6.3
PWM+6: DXM7.2 JP3-OBD7.3
PWM+7: DXM8.2 JP3-OBD8.3
PWM-: DXM1.3 JP3-OBD2.4
PWM-1: DXM2.3 JP3-OBD1.4
PWM-2: DXM3.3 JP3-OBD3.4
PWM-3: DXM4.3 JP3-OBD4.4
PWM-4: DXM5.3 JP3-OBD5.4
PWM-5: DXM6.3 JP3-OBD6.4
PWM-6: DXM7.3 JP3-OBD7.4
PWM-7: DXM8.3 JP3-OBD8.4
RF: BT-ANTENNA.RF IC2.P$37
RF1: BT-ANTENNA1.RF IC5.P$37
RF2: BT-ANTENNA2.RF IC8.P$37
RF3: BT-ANTENNA3.RF IC11.P$37
RF4: BT-ANTENNA4.RF IC14.P$37
RF5: BT-ANTENNA5.RF IC17.P$37
RF6: BT-ANTENNA6.RF IC20.P$37
RF7: BT-ANTENNA7.RF IC23.P$37
RTS: DXM1.27 JP2.7
RTS1: DXM2.27 JP4.7
RTS2: DXM3.27 JP6.7
RTS3: DXM4.27 JP8.7
RTS4: DXM5.27 JP10.7
RTS5: DXM6.27 JP12.7
RTS6: DXM7.27 JP14.7
RTS7: DXM8.27 JP16.7
SCK: DXM1.20 JP2.4
SCK1: DXM2.20 JP4.4
SCK2: DXM3.20 JP6.4
SCK3: DXM4.20 JP8.4
SCK4: DXM5.20 JP10.4
SCK5: DXM6.20 JP12.4
SCK6: DXM7.20 JP14.4
SCK7: DXM8.20 JP16.4

## Tracks (layer width: path | path; a pad name or v marks a point on that pad's centre or on a via)
12V_DOUT  (via drill 0.61)
  Top 0.254: 16.25,12.7 C4.1 | 25.14,13.02 R1.2 25.45,13.02 | 27.2,13.02 R2.2 27.36,12.86
  Top 0.61: C3.+ 31.33,18.41 32.12,18.41 v32.12,15.24 32.12,14.76 32.12,13.18 31.8,12.86 27.36,12.86 | 16.25,12.7 16.25,13.81 v16.41,13.97 | 25.14,13.02 20.69,17.46 v16.41,17.46 15.13,17.46 14.5,18.1 14.5,20.8 14.5,38.1 v14.5,43.66 | 27.2,13.02 25.45,13.02 | v13.07,46.35 12.91,46.35 7.04,46.35 DXM1.1 | v21.01,10.79 21.01,6.51 IC1.6
  Bottom 0.254: D2.C 31.01,6.83 | v16.41,17.46 16.56,17.3
  Bottom 0.61: 31.01,6.83 31.01,7.94 29.74,9.21 29.11,9.84 29.11,10 29.11,12.7 29.26,12.86 29.74,13.34 29.9,13.34 30.22,13.34 v32.12,15.24 | v16.41,17.46 v16.41,13.97 17.2,13.97 18.15,13.02 | v14.5,43.66 13.07,45.09 13.07,45.24 v13.07,46.35 | v21.01,10.79 21.01,11.59 20.21,12.38 18.79,12.38 18.15,13.02 | 18.15,13.02 17.68,13.49 18.15,13.02
12V_DOUT1  (via drill 0.61)
  Top 0.254: 16.25,62.7 C7.1 | 25.14,63.02 R12.2 25.45,63.02 | 27.2,63.02 R13.2 27.36,62.86
  Top 0.61: C10.+ 31.33,68.42 32.12,68.42 v32.12,65.24 32.12,64.76 32.12,63.18 31.8,62.86 27.36,62.86 | 16.25,62.7 16.25,63.81 v16.41,63.97 | 25.14,63.02 20.69,67.46 v16.41,67.46 15.13,67.46 14.5,68.1 14.5,70.8 14.5,88.1 v14.5,93.66 | 27.2,63.02 25.45,63.02 | v13.07,96.36 12.91,96.36 7.04,96.36 DXM2.1 | v21.01,60.8 21.01,56.51 IC4.6
  Bottom 0.254: D7.C 31.01,56.83 | v16.41,67.46 16.56,67.3
  Bottom 0.61: 31.01,56.83 31.01,57.94 29.74,59.21 29.11,59.84 29.11,60 29.11,62.7 29.26,62.86 29.74,63.34 29.9,63.34 30.22,63.34 v32.12,65.24 | v16.41,67.46 v16.41,63.97 17.2,63.97 18.15,63.02 | v14.5,93.66 13.07,95.08 13.07,95.24 v13.07,96.36 | v21.01,60.8 21.01,61.59 20.21,62.38 18.79,62.38 18.15,63.02 | 18.15,63.02 17.68,63.49 18.15,63.02
12V_DOUT2  (via drill 0.61)
  Top 0.254: 56.25,12.7 C12.1 | 65.14,13.02 R23.2 65.45,13.02 | 67.2,13.02 R24.2 67.36,12.86
  Top 0.61: C15.+ 71.33,18.41 72.12,18.41 v72.12,15.24 72.12,14.76 72.12,13.18 71.8,12.86 67.36,12.86 | 56.25,12.7 56.25,13.81 v56.41,13.97 | 65.14,13.02 60.69,17.46 v56.41,17.46 55.13,17.46 54.5,18.1 54.5,20.8 54.5,38.1 v54.5,43.66 | 67.2,13.02 65.45,13.02 | v53.07,46.35 52.91,46.35 47.04,46.35 DXM3.1 | v61.01,10.79 61.01,6.51 IC7.6
  Bottom 0.254: D12.C 71.01,6.83 | v56.41,17.46 56.56,17.3
  Bottom 0.61: 71.01,6.83 71.01,7.94 69.74,9.21 69.11,9.84 69.11,10 69.11,12.7 69.26,12.86 69.74,13.34 69.9,13.34 70.22,13.34 v72.12,15.24 | v56.41,17.46 v56.41,13.97 57.2,13.97 58.15,13.02 | v54.5,43.66 53.07,45.09 53.07,45.24 v53.07,46.35 | v61.01,10.79 61.01,11.59 60.22,12.38 58.79,12.38 58.15,13.02 | 58.15,13.02 57.67,13.49 58.15,13.02
12V_DOUT3  (via drill 0.61)
  Top 0.254: 97.25,12.7 C17.1 | 106.14,13.02 R34.2 106.45,13.02 | 108.2,13.02 R35.2 108.36,12.86
  Top 0.61: C20.+ 112.33,18.41 113.12,18.41 v113.12,15.24 113.12,14.76 113.12,13.18 112.8,12.86 108.36,12.86 | 97.25,12.7 97.25,13.81 v97.41,13.97 | 106.14,13.02 101.69,17.46 v97.41,17.46 96.14,17.46 95.5,18.1 95.5,20.8 95.5,38.1 v95.5,43.66 | 108.2,13.02 106.45,13.02 | v94.07,46.35 93.91,46.35 88.04,46.35 DXM4.1 | v102.01,10.79 102.01,6.51 IC10.6
  Bottom 0.254: D17.C 112.01,6.83 | v97.41,17.46 97.56,17.3
  Bottom 0.61: 112.01,6.83 112.01,7.94 110.74,9.21 110.11,9.84 110.11,10 110.11,12.7 110.26,12.86 110.74,13.34 110.9,13.34 111.22,13.34 v113.12,15.24 | v97.41,17.46 v97.41,13.97 98.2,13.97 99.15,13.02 | v95.5,43.66 94.07,45.09 94.07,45.24 v94.07,46.35 | v102.01,10.79 102.01,11.59 101.22,12.38 99.79,12.38 99.15,13.02 | 99.15,13.02 98.67,13.49 99.15,13.02
12V_DOUT4  (via drill 0.61)
  Top 0.254: 137.25,12.7 C22.1 | 146.14,13.02 R45.2 146.45,13.02 | 148.2,13.02 R46.2 148.36,12.86
  Top 0.61: C25.+ 152.33,18.41 153.12,18.41 v153.12,15.24 153.12,14.76 153.12,13.18 152.8,12.86 148.36,12.86 | 137.25,12.7 137.25,13.81 v137.41,13.97 | 146.14,13.02 141.69,17.46 v137.41,17.46 136.13,17.46 135.5,18.1 135.5,20.8 135.5,38.1 v135.5,43.66 | 148.2,13.02 146.45,13.02 | v134.07,46.35 133.91,46.35 128.04,46.35 DXM5.1 | v142.01,10.79 142.01,6.51 IC13.6
  Bottom 0.254: D22.C 152.01,6.83 | v137.41,17.46 137.56,17.3
  Bottom 0.61: 152.01,6.83 152.01,7.94 150.74,9.21 150.1,9.84 150.1,10 150.1,12.7 150.26,12.86 150.74,13.34 150.9,13.34 151.22,13.34 v153.12,15.24 | v137.41,17.46 v137.41,13.97 138.2,13.97 139.15,13.02 | v135.5,43.66 134.07,45.09 134.07,45.24 v134.07,46.35 | v142.01,10.79 142.01,11.59 141.22,12.38 139.79,12.38 139.15,13.02 | 139.15,13.02 138.68,13.49 139.15,13.02
12V_DOUT5  (via drill 0.61)
  Top 0.254: 56.25,62.7 C27.1 | 65.14,63.02 R56.2 65.45,63.02 | 67.2,63.02 R57.2 67.36,62.86
  Top 0.61: C30.+ 71.33,68.42 72.12,68.42 v72.12,65.24 72.12,64.76 72.12,63.18 71.8,62.86 67.36,62.86 | 56.25,62.7 56.25,63.81 v56.41,63.97 | 65.14,63.02 60.69,67.46 v56.41,67.46 55.13,67.46 54.5,68.1 54.5,70.8 54.5,88.1 v54.5,93.66 | 67.2,63.02 65.45,63.02 | v53.07,96.36 52.91,96.36 47.04,96.36 DXM6.1 | v61.01,60.8 61.01,56.51 IC16.6
  Bottom 0.254: D27.C 71.01,56.83 | v56.41,67.46 56.56,67.3
  Bottom 0.61: 71.01,56.83 71.01,57.94 69.74,59.21 69.11,59.84 69.11,60 69.11,62.7 69.26,62.86 69.74,63.34 69.9,63.34 70.22,63.34 v72.12,65.24 | v56.41,67.46 v56.41,63.97 57.2,63.97 58.15,63.02 | v54.5,93.66 53.07,95.08 53.07,95.24 v53.07,96.36 | v61.01,60.8 61.01,61.59 60.22,62.38 58.79,62.38 58.15,63.02 | 58.15,63.02 57.67,63.49 58.15,63.02
12V_DOUT6  (via drill 0.61)
  Top 0.254: 97.25,62.7 C32.1 | 106.14,63.02 R67.2 106.45,63.02 | 108.2,63.02 R68.2 108.36,62.86
  Top 0.61: C35.+ 112.33,68.42 113.12,68.42 v113.12,65.24 113.12,64.76 113.12,63.18 112.8,62.86 108.36,62.86 | 97.25,62.7 97.25,63.81 v97.41,63.97 | 106.14,63.02 101.69,67.46 v97.41,67.46 96.14,67.46 95.5,68.1 95.5,70.8 95.5,88.1 v95.5,93.66 | 108.2,63.02 106.45,63.02 | v94.07,96.36 93.91,96.36 88.04,96.36 DXM7.1 | v102.01,60.8 102.01,56.51 IC19.6
  Bottom 0.254: D32.C 112.01,56.83 | v97.41,67.46 97.56,67.3
  Bottom 0.61: 112.01,56.83 112.01,57.94 110.74,59.21 110.11,59.84 110.11,60 110.11,62.7 110.26,62.86 110.74,63.34 110.9,63.34 111.22,63.34 v113.12,65.24 | v97.41,67.46 v97.41,63.97 98.2,63.97 99.15,63.02 | v95.5,93.66 94.07,95.08 94.07,95.24 v94.07,96.36 | v102.01,60.8 102.01,61.59 101.22,62.38 99.79,62.38 99.15,63.02 | 99.15,63.02 98.67,63.49 99.15,63.02
12V_DOUT7  (via drill 0.61)
  Top 0.254: 137.25,62.7 C37.1 | 146.14,63.02 R78.2 146.45,63.02 | 148.2,63.02 R79.2 148.36,62.86
  Top 0.61: C40.+ 152.33,68.42 153.12,68.42 v153.12,65.24 153.12,64.76 153.12,63.18 152.8,62.86 148.36,62.86 | 137.25,62.7 137.25,63.81 v137.41,63.97 | 146.14,63.02 141.69,67.46 v137.41,67.46 136.13,67.46 135.5,68.1 135.5,70.8 135.5,88.1 v135.5,93.66 | 148.2,63.02 146.45,63.02 | v134.07,96.36 133.91,96.36 128.04,96.36 DXM8.1 | v142.01,60.8 142.01,56.51 IC22.6
  Bottom 0.254: D37.C 152.01,56.83 | v137.41,67.46 137.56,67.3
  Bottom 0.61: 152.01,56.83 152.01,57.94 150.74,59.21 150.1,59.84 150.1,60 150.1,62.7 150.26,62.86 150.74,63.34 150.9,63.34 151.22,63.34 v153.12,65.24 | v137.41,67.46 v137.41,63.97 138.2,63.97 139.15,63.02 | v135.5,93.66 134.07,95.08 134.07,95.24 v134.07,96.36 | v142.01,60.8 142.01,61.59 141.22,62.38 139.79,62.38 139.15,63.02 | 139.15,63.02 138.68,63.49 139.15,63.02
+3V1  (via drill 0.61)
  Top 0.254: 17.04,59.84 17.04,57.94 | 16.25,60.64 C6.1 16.09,60.64 | 17.68,57.3 R15.2 | 6.88,71.43 DXM2.14
  Top 0.406: 16.25,60.64 17.04,59.84 | 17.04,57.94 17.68,57.3 | 16.09,60.64 13.55,60.64 11.32,58.41 L2.1 | v5.13,71.43 6.88,71.43 | C9.+ 33.23,73.5 v32.76,73.97 | v24.66,86.83 24.66,75.24 v21.17,71.75
  Bottom 0.254: IC5.P$2 27.2,90.48 | 27.04,70.32 IC5.P$17 27.2,70.48 | 24.82,69.05 IC6.P$14 | 9.58,67.62 IC6.P$16
  Bottom 0.406: 27.2,90.48 30.38,93.66 30.38,94.29 JP3.1 | 27.04,70.32 26.57,70.32 25.3,69.05 24.82,69.05 | 9.58,67.62 10.85,67.62 11.48,66.99 12.75,66.99 15.29,69.53 19.1,69.53 19.58,69.05 20.69,69.05 | IC6.P$14 24.02,68.89 v21.17,71.75 | v21.17,71.75 | v21.17,71.75 | 21.17,69.53 20.69,69.05 | IC6.P$16 8.79,67.78 v5.13,71.43 4.34,71.43 3.86,70.95 3.86,69.21 7.51,65.56 7.51,60.64 11.17,56.98 L2.1 | v32.76,73.97 31.17,73.97 27.68,70.48 27.2,70.48 | v24.66,86.83 24.66,88.89 26.25,90.48 27.04,90.48 IC5.P$2 | 21.17,69.53 20.69,69.05 | v21.17,71.75 21.17,69.53 | v21.17,71.75 | 21.17,69.53 20.69,69.05 | 21.17,69.53 v21.17,71.75
+3V2  (via drill 0.61)
  Top 0.254: 57.04,9.84 57.04,7.94 | 56.25,10.64 C11.1 56.09,10.64 | 57.67,7.3 R26.2 | 46.88,21.43 DXM3.14
  Top 0.406: 56.25,10.64 57.04,9.84 | 57.04,7.94 57.67,7.3 | 56.09,10.64 53.55,10.64 51.33,8.41 L3.1 | v45.13,21.43 46.88,21.43 | C14.+ 73.23,23.5 v72.76,23.97 | v64.66,36.83 64.66,25.24 v61.17,21.75
  Bottom 0.254: IC8.P$2 67.2,40.48 | 67.04,20.32 IC8.P$17 67.2,20.48 | 64.82,19.05 IC9.P$14 | 49.58,17.62 IC9.P$16
  Bottom 0.406: 67.2,40.48 70.38,43.66 70.38,44.29 JP5.1 | 67.04,20.32 66.56,20.32 65.3,19.05 64.82,19.05 | 49.58,17.62 50.85,17.62 51.48,16.99 52.75,16.99 55.29,19.53 59.1,19.53 59.58,19.05 60.69,19.05 | IC9.P$14 64.03,18.89 v61.17,21.75 | v61.17,21.75 | v61.17,21.75 | 61.17,19.53 60.69,19.05 | IC9.P$16 48.78,17.78 v45.13,21.43 44.34,21.43 43.86,20.95 43.86,19.21 47.52,15.56 47.52,10.64 51.17,6.99 L3.1 | v72.76,23.97 71.17,23.97 67.68,20.48 67.2,20.48 | v64.66,36.83 64.66,38.89 66.25,40.48 67.04,40.48 IC8.P$2 | 61.17,19.53 60.69,19.05 | v61.17,21.75 61.17,19.53 | v61.17,21.75 | 61.17,19.53 60.69,19.05 | 61.17,19.53 v61.17,21.75
+3V3  (via drill 0.61)
  Top 0.254: 17.04,9.84 17.04,7.94 | 16.25,10.64 C1.1 16.09,10.64 | 17.68,7.3 R4.2 | 6.88,21.43 DXM1.14
  Top 0.406: 16.25,10.64 17.04,9.84 | 17.04,7.94 17.68,7.3 | 16.09,10.64 13.55,10.64 11.32,8.41 L1.1 | v5.13,21.43 6.88,21.43 | C2.+ 33.23,23.5 v32.76,23.97 | v24.66,36.83 24.66,25.24 v21.17,21.75
  Bottom 0.254: IC2.P$2 27.2,40.48 | 27.04,20.32 IC2.P$17 27.2,20.48 | 24.82,19.05 IC3.P$14 | 9.58,17.62 IC3.P$16
  Bottom 0.406: 27.2,40.48 30.38,43.66 30.38,44.29 JP1.1 | 27.04,20.32 26.57,20.32 25.3,19.05 24.82,19.05 | 9.58,17.62 10.85,17.62 11.48,16.99 12.75,16.99 15.29,19.53 19.1,19.53 19.58,19.05 20.69,19.05 | IC3.P$14 24.02,18.89 v21.17,21.75 | v21.17,21.75 | v21.17,21.75 | 21.17,19.53 20.69,19.05 | IC3.P$16 8.79,17.78 v5.13,21.43 4.34,21.43 3.86,20.95 3.86,19.21 7.51,15.56 7.51,10.64 11.17,6.99 L1.1 | v32.76,23.97 31.17,23.97 27.68,20.48 27.2,20.48 | v24.66,36.83 24.66,38.89 26.25,40.48 27.04,40.48 IC2.P$2 | 21.17,19.53 20.69,19.05 | v21.17,21.75 21.17,19.53 | v21.17,21.75 | 21.17,19.53 20.69,19.05 | 21.17,19.53 v21.17,21.75
+3V4  (via drill 0.61)
  Top 0.254: 98.04,9.84 98.04,7.94 | 97.25,10.64 C16.1 97.09,10.64 | 98.67,7.3 R37.2 | 87.88,21.43 DXM4.14
  Top 0.406: 97.25,10.64 98.04,9.84 | 98.04,7.94 98.67,7.3 | 97.09,10.64 94.55,10.64 92.33,8.41 L4.1 | v86.13,21.43 87.88,21.43 | C19.+ 114.23,23.5 v113.76,23.97 | v105.66,36.83 105.66,25.24 v102.17,21.75
  Bottom 0.254: IC11.P$2 108.2,40.48 | 108.04,20.32 IC11.P$17 108.2,20.48 | 105.82,19.05 IC12.P$14 | 90.58,17.62 IC12.P$16
  Bottom 0.406: 108.2,40.48 111.38,43.66 111.38,44.29 JP7.1 | 108.04,20.32 107.56,20.32 106.3,19.05 105.82,19.05 | 90.58,17.62 91.85,17.62 92.48,16.99 93.75,16.99 96.29,19.53 100.1,19.53 100.58,19.05 101.69,19.05 | IC12.P$14 105.03,18.89 v102.17,21.75 | v102.17,21.75 | v102.17,21.75 | 102.17,19.53 101.69,19.05 | IC12.P$16 89.78,17.78 v86.13,21.43 85.34,21.43 84.86,20.95 84.86,19.21 88.52,15.56 88.52,10.64 92.17,6.99 L4.1 | v113.76,23.97 112.17,23.97 108.68,20.48 108.2,20.48 | v105.66,36.83 105.66,38.89 107.25,40.48 108.04,40.48 IC11.P$2 | 102.17,19.53 101.69,19.05 | v102.17,21.75 102.17,19.53 | v102.17,21.75 | 102.17,19.53 101.69,19.05 | 102.17,19.53 v102.17,21.75
+3V5  (via drill 0.61)
  Top 0.254: 138.04,9.84 138.04,7.94 | 137.25,10.64 C21.1 137.09,10.64 | 138.68,7.3 R48.2 | 127.88,21.43 DXM5.14
  Top 0.406: 137.25,10.64 138.04,9.84 | 138.04,7.94 138.68,7.3 | 137.09,10.64 134.55,10.64 132.32,8.41 L5.1 | v126.13,21.43 127.88,21.43 | C24.+ 154.23,23.5 v153.76,23.97 | v145.66,36.83 145.66,25.24 v142.17,21.75
  Bottom 0.254: IC14.P$2 148.2,40.48 | 148.04,20.32 IC14.P$17 148.2,20.48 | 145.82,19.05 IC15.P$14 | 130.58,17.62 IC15.P$16
  Bottom 0.406: 148.2,40.48 151.38,43.66 151.38,44.29 JP9.1 | 148.04,20.32 147.56,20.32 146.29,19.05 145.82,19.05 | 130.58,17.62 131.85,17.62 132.48,16.99 133.75,16.99 136.29,19.53 140.1,19.53 140.58,19.05 141.69,19.05 | IC15.P$14 145.03,18.89 v142.17,21.75 | v142.17,21.75 | v142.17,21.75 | 142.17,19.53 141.69,19.05 | IC15.P$16 129.78,17.78 v126.13,21.43 125.34,21.43 124.86,20.95 124.86,19.21 128.51,15.56 128.51,10.64 132.17,6.99 L5.1 | v153.76,23.97 152.17,23.97 148.68,20.48 148.2,20.48 | v145.66,36.83 145.66,38.89 147.25,40.48 148.04,40.48 IC14.P$2 | 142.17,19.53 141.69,19.05 | v142.17,21.75 142.17,19.53 | v142.17,21.75 | 142.17,19.53 141.69,19.05 | 142.17,19.53 v142.17,21.75
+3V6  (via drill 0.61)
  Top 0.254: 57.04,59.84 57.04,57.94 | 56.25,60.64 C26.1 56.09,60.64 | 57.67,57.3 R59.2 | 46.88,71.43 DXM6.14
  Top 0.406: 56.25,60.64 57.04,59.84 | 57.04,57.94 57.67,57.3 | 56.09,60.64 53.55,60.64 51.33,58.41 L6.1 | v45.13,71.43 46.88,71.43 | C29.+ 73.23,73.5 v72.76,73.97 | v64.66,86.83 64.66,75.24 v61.17,71.75
  Bottom 0.254: IC17.P$2 67.2,90.48 | 67.04,70.32 IC17.P$17 67.2,70.48 | 64.82,69.05 IC18.P$14 | 49.58,67.62 IC18.P$16
  Bottom 0.406: 67.2,90.48 70.38,93.66 70.38,94.29 JP11.1 | 67.04,70.32 66.56,70.32 65.3,69.05 64.82,69.05 | 49.58,67.62 50.85,67.62 51.48,66.99 52.75,66.99 55.29,69.53 59.1,69.53 59.58,69.05 60.69,69.05 | IC18.P$14 64.03,68.89 v61.17,71.75 | v61.17,71.75 | v61.17,71.75 | 61.17,69.53 60.69,69.05 | IC18.P$16 48.78,67.78 v45.13,71.43 44.34,71.43 43.86,70.95 43.86,69.21 47.52,65.56 47.52,60.64 51.17,56.98 L6.1 | v72.76,73.97 71.17,73.97 67.68,70.48 67.2,70.48 | v64.66,86.83 64.66,88.89 66.25,90.48 67.04,90.48 IC17.P$2 | 61.17,69.53 60.69,69.05 | v61.17,71.75 61.17,69.53 | v61.17,71.75 | 61.17,69.53 60.69,69.05 | 61.17,69.53 v61.17,71.75
+3V7  (via drill 0.61)
  Top 0.254: 98.04,59.84 98.04,57.94 | 97.25,60.64 C31.1 97.09,60.64 | 98.67,57.3 R70.2 | 87.88,71.43 DXM7.14
  Top 0.406: 97.25,60.64 98.04,59.84 | 98.04,57.94 98.67,57.3 | 97.09,60.64 94.55,60.64 92.33,58.41 L7.1 | v86.13,71.43 87.88,71.43 | C34.+ 114.23,73.5 v113.76,73.97 | v105.66,86.83 105.66,75.24 v102.17,71.75
  Bottom 0.254: IC20.P$2 108.2,90.48 | 108.04,70.32 IC20.P$17 108.2,70.48 | 105.82,69.05 IC21.P$14 | 90.58,67.62 IC21.P$16
  Bottom 0.406: 108.2,90.48 111.38,93.66 111.38,94.29 JP13.1 | 108.04,70.32 107.56,70.32 106.3,69.05 105.82,69.05 | 90.58,67.62 91.85,67.62 92.48,66.99 93.75,66.99 96.29,69.53 100.1,69.53 100.58,69.05 101.69,69.05 | IC21.P$14 105.03,68.89 v102.17,71.75 | v102.17,71.75 | v102.17,71.75 | 102.17,69.53 101.69,69.05 | IC21.P$16 89.78,67.78 v86.13,71.43 85.34,71.43 84.86,70.95 84.86,69.21 88.52,65.56 88.52,60.64 92.17,56.98 L7.1 | v113.76,73.97 112.17,73.97 108.68,70.48 108.2,70.48 | v105.66,86.83 105.66,88.89 107.25,90.48 108.04,90.48 IC20.P$2 | 102.17,69.53 101.69,69.05 | v102.17,71.75 102.17,69.53 | v102.17,71.75 | 102.17,69.53 101.69,69.05 | 102.17,69.53 v102.17,71.75
+3V8  (via drill 0.61)
  Top 0.254: 138.04,59.84 138.04,57.94 | 137.25,60.64 C36.1 137.09,60.64 | 138.68,57.3 R81.2 | 127.88,71.43 DXM8.14
  Top 0.406: 137.25,60.64 138.04,59.84 | 138.04,57.94 138.68,57.3 | 137.09,60.64 134.55,60.64 132.32,58.41 L8.1 | v126.13,71.43 127.88,71.43 | C39.+ 154.23,73.5 v153.76,73.97 | v145.66,86.83 145.66,75.24 v142.17,71.75
  Bottom 0.254: IC23.P$2 148.2,90.48 | 148.04,70.32 IC23.P$17 148.2,70.48 | 145.82,69.05 IC24.P$14 | 130.58,67.62 IC24.P$16
  Bottom 0.406: 148.2,90.48 151.38,93.66 151.38,94.29 JP15.1 | 148.04,70.32 147.56,70.32 146.29,69.05 145.82,69.05 | 130.58,67.62 131.85,67.62 132.48,66.99 133.75,66.99 136.29,69.53 140.1,69.53 140.58,69.05 141.69,69.05 | IC24.P$14 145.03,68.89 v142.17,71.75 | v142.17,71.75 | v142.17,71.75 | 142.17,69.53 141.69,69.05 | IC24.P$16 129.78,67.78 v126.13,71.43 125.34,71.43 124.86,70.95 124.86,69.21 128.51,65.56 128.51,60.64 132.17,56.98 L8.1 | v153.76,73.97 152.17,73.97 148.68,70.48 148.2,70.48 | v145.66,86.83 145.66,88.89 147.25,90.48 148.04,90.48 IC23.P$2 | 142.17,69.53 141.69,69.05 | v142.17,71.75 142.17,69.53 | v142.17,71.75 | 142.17,69.53 141.69,69.05 | 142.17,69.53 v142.17,71.75
+12V  (via drill 0.61)
  Top 0.254: 6.56,7.14 SG2.(+)LEAD 6.72,7.14 | 3.86,7.46 SG1.1
  Top 0.61: 6.56,7.14 4.18,7.14 3.86,7.46 | 37.52,6.35 37.52,4.92 37.52,3.02 36.57,2.22 D5.C | 37.52,6.35 REL1.1 37.52,6.35 | v34.34,15.24 37.04,15.24 37.52,14.76 37.52,10.64 | 37.52,10.64 37.52,7.94 37.52,6.35 | v26.88,7.62 27.2,7.46 28.79,7.46 30.69,7.46 33.87,10.64 37.52,10.64 | 6.72,7.14 6.56,7.3 6.56,9.21 8.47,11.11 v8.47,13.02 | v8.47,13.02 | v9.74,10 9.1,9.37 9.1,5.71 10.05,4.76 13.55,4.76 JP2-OBD2.4
  Bottom 0.61: v34.34,15.24 31.17,12.06 31.17,11.11 D2.A | v26.88,7.62 25.45,6.19 18.95,6.19 15.77,3.02 JP2-OBD2.4 | v8.47,13.02 8.47,11.27 v9.74,10
+12V1  (via drill 0.61)
  Top 0.254: 6.56,57.14 SG4.(+)LEAD 6.72,57.14 | 3.86,57.46 SG3.1
  Top 0.61: 6.56,57.14 4.18,57.14 3.86,57.46 | 37.52,56.35 37.52,54.92 37.52,53.02 36.57,52.22 D10.C | 37.52,56.35 REL2.1 37.52,56.35 | v34.34,65.24 37.04,65.24 37.52,64.76 37.52,60.64 | 37.52,60.64 37.52,57.94 37.52,56.35 | v26.88,57.62 27.2,57.46 28.79,57.46 30.69,57.46 33.87,60.64 37.52,60.64 | 6.72,57.14 6.56,57.3 6.56,59.21 8.47,61.11 v8.47,63.02 | v9.74,60 9.1,59.37 9.1,55.72 10.05,54.76 13.55,54.76 JP2-OBD1.4
  Bottom 0.61: v34.34,65.24 31.17,62.06 31.17,61.11 D7.A | v26.88,57.62 25.45,56.19 18.95,56.19 15.77,53.02 JP2-OBD1.4 | v8.47,63.02 8.47,61.27 v9.74,60
+12V2  (via drill 0.61)
  Top 0.254: 46.56,7.14 SG6.(+)LEAD 46.72,7.14 | 43.86,7.46 SG5.1
  Top 0.61: 46.56,7.14 44.18,7.14 43.86,7.46 | 77.52,6.35 77.52,4.92 77.52,3.02 76.57,2.22 D15.C | 77.52,6.35 REL3.1 77.52,6.35 | v74.34,15.24 77.04,15.24 77.52,14.76 77.52,10.64 | 77.52,10.64 77.52,7.94 77.52,6.35 | v66.88,7.62 67.2,7.46 68.79,7.46 70.69,7.46 73.87,10.64 77.52,10.64 | 46.72,7.14 46.56,7.3 46.56,9.21 48.47,11.11 v48.47,13.02 | v48.47,13.02 | v49.74,10 49.1,9.37 49.1,5.71 50.05,4.76 53.55,4.76 JP2-OBD3.4
  Bottom 0.61: v74.34,15.24 71.17,12.06 71.17,11.11 D12.A | v66.88,7.62 65.45,6.19 58.95,6.19 55.77,3.02 JP2-OBD3.4 | v48.47,13.02 48.47,11.27 v49.74,10
+12V3  (via drill 0.61)
  Top 0.254: 87.56,7.14 SG8.(+)LEAD 87.72,7.14 | 84.86,7.46 SG7.1
  Top 0.61: 87.56,7.14 85.18,7.14 84.86,7.46 | 118.52,6.35 118.52,4.92 118.52,3.02 117.57,2.22 D20.C | 118.52,6.35 REL4.1 118.52,6.35 | v115.34,15.24 118.04,15.24 118.52,14.76 118.52,10.64 | 118.52,10.64 118.52,7.94 118.52,6.35 | v107.88,7.62 108.2,7.46 109.79,7.46 111.69,7.46 114.87,10.64 118.52,10.64 | 87.72,7.14 87.56,7.3 87.56,9.21 89.47,11.11 v89.47,13.02 | v89.47,13.02 | v90.74,10 90.1,9.37 90.1,5.71 91.06,4.76 94.55,4.76 JP2-OBD4.4
  Bottom 0.61: v115.34,15.24 112.17,12.06 112.17,11.11 D17.A | v107.88,7.62 106.45,6.19 99.94,6.19 96.77,3.02 JP2-OBD4.4 | v89.47,13.02 89.47,11.27 v90.74,10
+12V4  (via drill 0.61)
  Top 0.254: 127.56,7.14 SG10.(+)LEAD 127.72,7.14 | 124.86,7.46 SG9.1
  Top 0.61: 127.56,7.14 125.18,7.14 124.86,7.46 | 158.52,6.35 158.52,4.92 158.52,3.02 157.57,2.22 D25.C | 158.52,6.35 REL5.1 158.52,6.35 | v155.34,15.24 158.04,15.24 158.52,14.76 158.52,10.64 | 158.52,10.64 158.52,7.94 158.52,6.35 | v147.88,7.62 148.2,7.46 149.79,7.46 151.69,7.46 154.87,10.64 158.52,10.64 | 127.72,7.14 127.56,7.3 127.56,9.21 129.47,11.11 v129.47,13.02 | v129.47,13.02 | v130.74,10 130.1,9.37 130.1,5.71 131.06,4.76 134.55,4.76 JP2-OBD5.4
  Bottom 0.61: v155.34,15.24 152.17,12.06 152.17,11.11 D22.A | v147.88,7.62 146.45,6.19 139.94,6.19 136.77,3.02 JP2-OBD5.4 | v129.47,13.02 129.47,11.27 v130.74,10
+12V5  (via drill 0.61)
  Top 0.254: 46.56,57.14 SG12.(+)LEAD 46.72,57.14 | 43.86,57.46 SG11.1
  Top 0.61: 46.56,57.14 44.18,57.14 43.86,57.46 | 77.52,56.35 77.52,54.92 77.52,53.02 76.57,52.22 D30.C | 77.52,56.35 REL6.1 77.52,56.35 | v74.34,65.24 77.04,65.24 77.52,64.76 77.52,60.64 | 77.52,60.64 77.52,57.94 77.52,56.35 | v66.88,57.62 67.2,57.46 68.79,57.46 70.69,57.46 73.87,60.64 77.52,60.64 | 46.72,57.14 46.56,57.3 46.56,59.21 48.47,61.11 v48.47,63.02 | v49.74,60 49.1,59.37 49.1,55.72 50.05,54.76 53.55,54.76 JP2-OBD6.4
  Bottom 0.61: v74.34,65.24 71.17,62.06 71.17,61.11 D27.A | v66.88,57.62 65.45,56.19 58.95,56.19 55.77,53.02 JP2-OBD6.4 | v48.47,63.02 48.47,61.27 v49.74,60
+12V6  (via drill 0.61)
  Top 0.254: 87.56,57.14 SG14.(+)LEAD 87.72,57.14 | 84.86,57.46 SG13.1
  Top 0.61: 87.56,57.14 85.18,57.14 84.86,57.46 | 118.52,56.35 118.52,54.92 118.52,53.02 117.57,52.22 D35.C | 118.52,56.35 REL7.1 118.52,56.35 | v115.34,65.24 118.04,65.24 118.52,64.76 118.52,60.64 | 118.52,60.64 118.52,57.94 118.52,56.35 | v107.88,57.62 108.2,57.46 109.79,57.46 111.69,57.46 114.87,60.64 118.52,60.64 | 87.72,57.14 87.56,57.3 87.56,59.21 89.47,61.11 v89.47,63.02 | v90.74,60 90.1,59.37 90.1,55.72 91.06,54.76 94.55,54.76 JP2-OBD7.4
  Bottom 0.61: v115.34,65.24 112.17,62.06 112.17,61.11 D32.A | v107.88,57.62 106.45,56.19 99.94,56.19 96.77,53.02 JP2-OBD7.4 | v89.47,63.02 89.47,61.27 v90.74,60
+12V7  (via drill 0.61)
  Top 0.254: 127.56,57.14 SG16.(+)LEAD 127.72,57.14 | 124.86,57.46 SG15.1